# Allegro board AGET_ERNI2HRS_HardBoard.brd
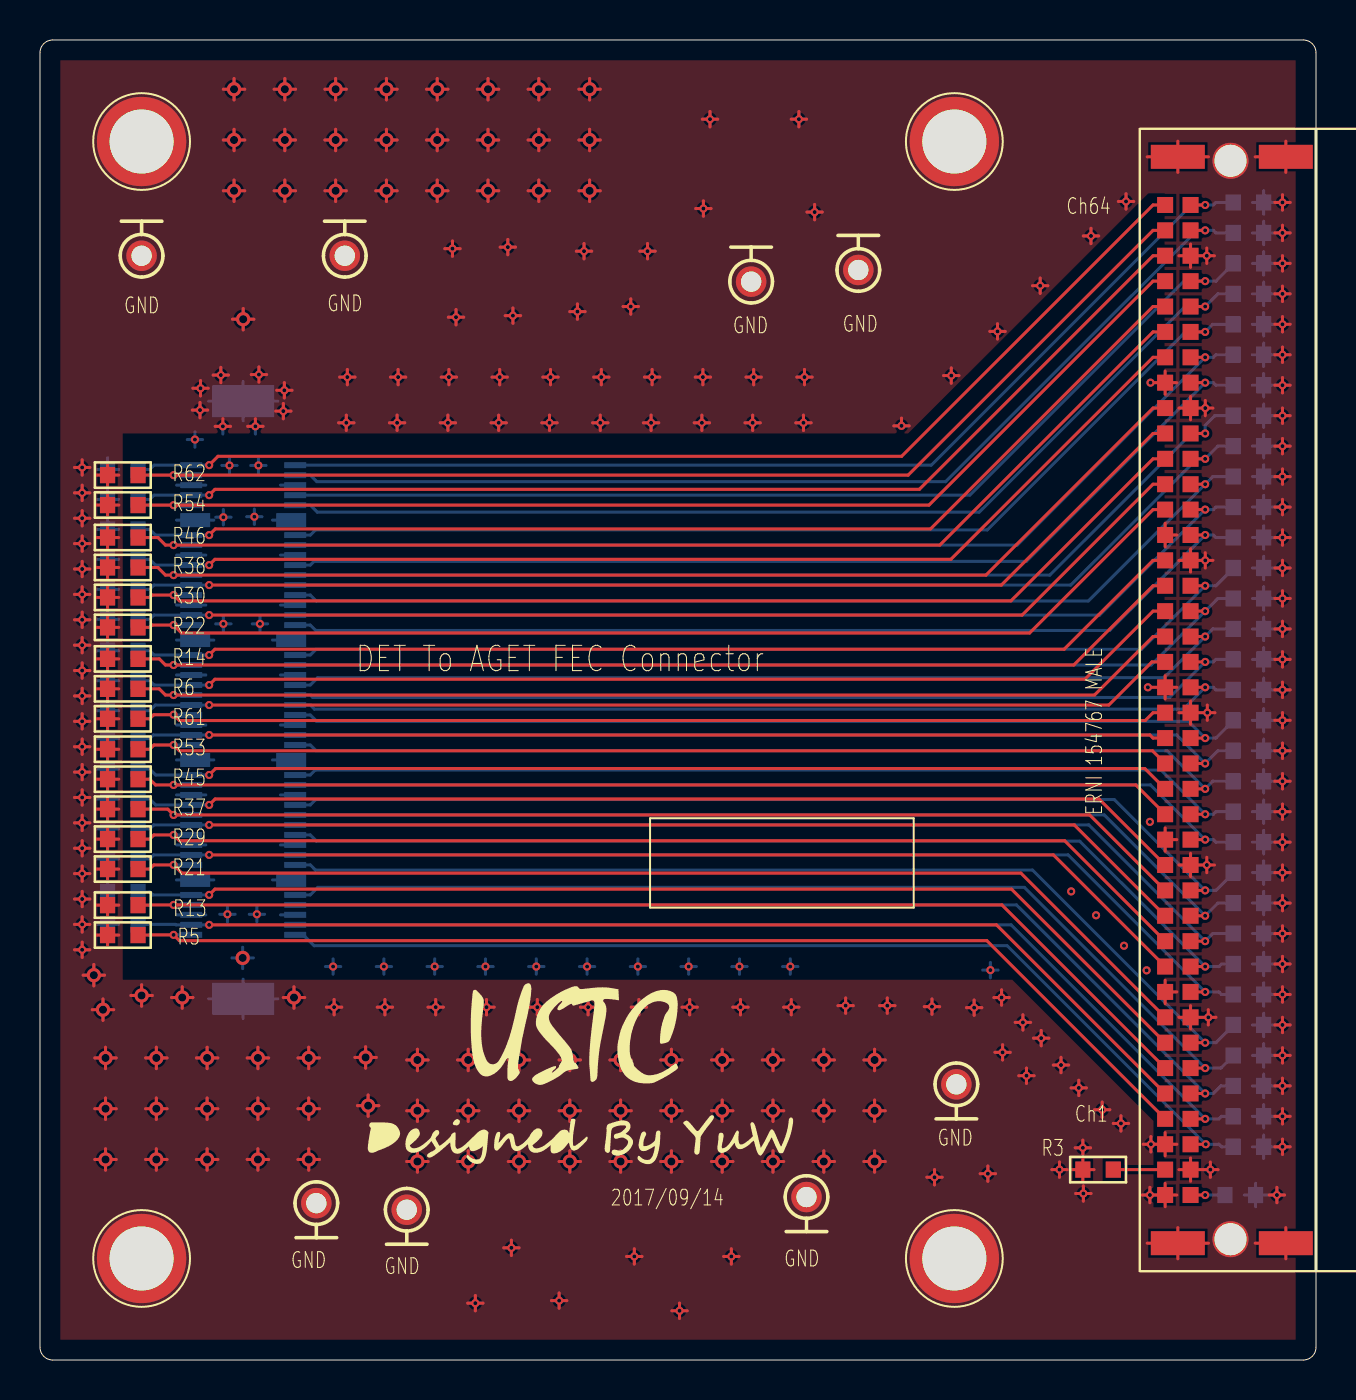
[diagram p0: board, top side]
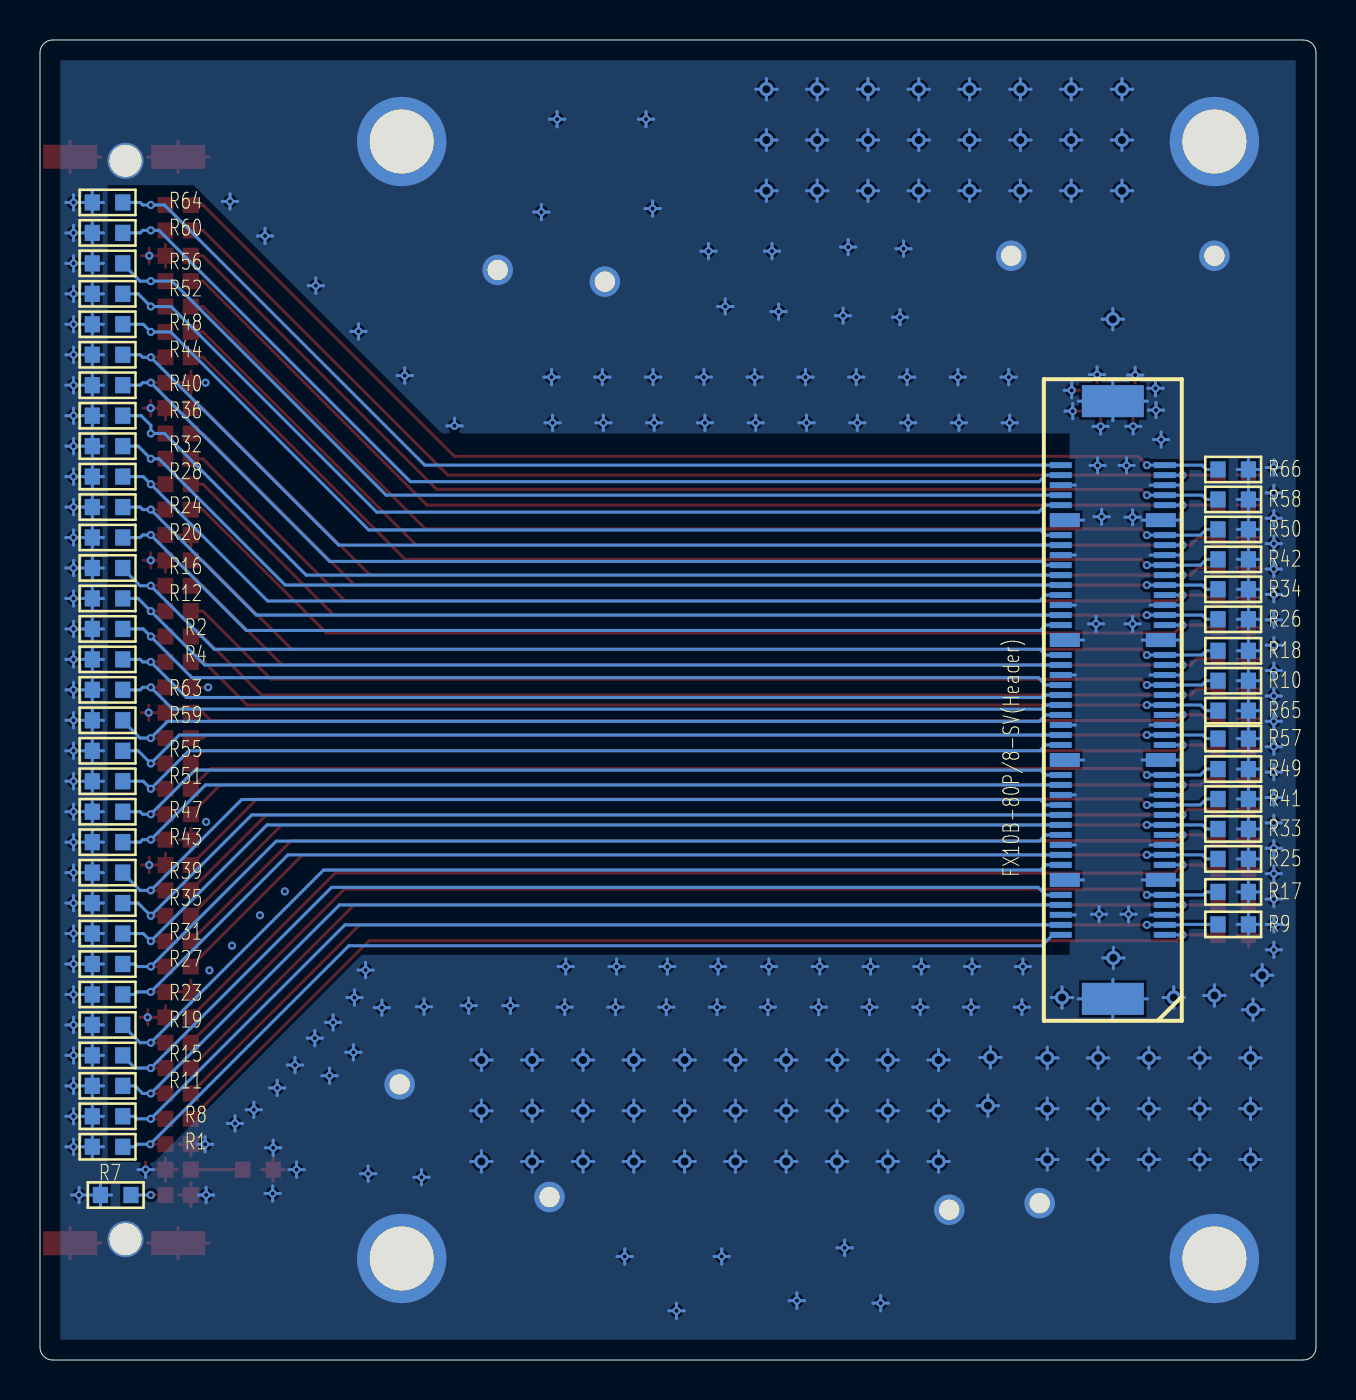
[diagram p1: board, bottom side, seen from below]

Outline 63.8 x 66.04 mm; copper layers: TOP, GND1, GND2, BOTTOM. Coordinates in mm from the lower left corner of the outline.
Outline path: 0,65.41 0,0.64 arc(0.19,0.19) 0.64,0 63.17,0 arc(63.62,0.19) 63.8,0.64 63.8,65.41 arc(63.62,65.85) 63.17,66.04 0.64,66.04 arc(0.19,65.85) 0,65.41

## Placement (name value [footprint] x y rotation side)
J1  CONN  [ERNI154744FEMALECONNECTOR]  57.53 57.78 0 top
M1  MECH_HOLE_3MM  [MECH_HOLE_3_2MM_PLATED]  5.08 60.96 0 top
M2  MECH_HOLE_3MM  [MECH_HOLE_3_2MM_PLATED]  5.08 5.08 0 top
M3  MECH_HOLE_3MM  [MECH_HOLE_3_2MM_PLATED]  45.72 5.08 0 top
M4  MECH_HOLE_3MM  [MECH_HOLE_3_2MM_PLATED]  45.72 60.96 0 top
NOREF  -  []  84.2 64.11 0 top
NOREF#2  -  []  15.11 5.15 0 top
NOREF#3  -  []  0 0 90 top
NOREF#4  -  []  0 66.04 0 top
NOREF#5  -  []  20.17 12.69 0 top
R1  1M  [SR0603]  60.43 10.67 0 bottom
R2  1M  [SR0603]  60.43 36.58 0 bottom
R3  x  [SR0603]  52.91 9.53 180 top
R4  1M  [SR0603]  60.43 35.05 0 bottom
R5  1M  [SR0603]  4.14 21.26 180 top
R6  1M  [SR0603]  4.14 33.58 180 top
R7  x  [SR0603]  60.02 8.26 180 bottom
R8  1M  [SR0603]  60.43 12.19 0 bottom
R9  1M  [SR0603]  4.14 21.79 180 bottom
R10  1M  [SR0603]  4.14 33.99 180 bottom
R11  1M  [SR0603]  60.43 13.72 0 bottom
R12  1M  [SR0603]  60.43 38.1 0 bottom
R13  1M  [SR0603]  4.14 22.76 180 top
R14  1M  [SR0603]  4.14 35.08 180 top
R15  1M  [SR0603]  60.43 15.24 0 bottom
R16  1M  [SR0603]  60.43 39.62 0 bottom
R17  1M  [SR0603]  4.14 23.42 180 bottom
R18  1M  [SR0603]  4.14 35.48 180 bottom
R19  1M  [SR0603]  60.43 16.76 0 bottom
R20  1M  [SR0603]  60.43 41.15 0 bottom
R21  1M  [SR0603]  4.14 24.56 180 top
R22  1M  [SR0603]  4.14 36.65 180 top
R23  1M  [SR0603]  60.43 18.29 0 bottom
R24  1M  [SR0603]  60.43 42.67 0 bottom
R25  1M  [SR0603]  4.14 25.07 180 bottom
R26  1M  [SR0603]  4.14 37.06 180 bottom
R27  1M  [SR0603]  60.43 19.81 0 bottom
R28  1M  [SR0603]  60.43 44.2 0 bottom
R29  1M  [SR0603]  4.14 26.06 180 top
R30  1M  [SR0603]  4.14 38.15 180 top
R31  1M  [SR0603]  60.43 21.34 0 bottom
R32  1M  [SR0603]  60.43 45.72 0 bottom
R33  1M  [SR0603]  4.14 26.57 180 bottom
R34  1M  [SR0603]  4.14 38.56 180 bottom
R35  1M  [SR0603]  60.43 22.86 0 bottom
R36  1M  [SR0603]  60.43 47.24 0 bottom
R37  1M  [SR0603]  4.14 27.56 180 top
R38  1M  [SR0603]  4.14 39.65 180 top
R39  1M  [SR0603]  60.43 24.38 0 bottom
R40  1M  [SR0603]  60.43 48.77 0 bottom
R41  1M  [SR0603]  4.14 28.07 180 bottom
R42  1M  [SR0603]  4.14 40.06 180 bottom
R43  1M  [SR0603]  60.43 25.91 0 bottom
R44  1M  [SR0603]  60.43 50.29 0 bottom
R45  1M  [SR0603]  4.14 29.06 180 top
R46  1M  [SR0603]  4.14 41.15 180 top
R47  1M  [SR0603]  60.43 27.43 0 bottom
R48  1M  [SR0603]  60.43 51.82 0 bottom
R49  1M  [SR0603]  4.14 29.57 180 bottom
R50  1M  [SR0603]  4.14 41.55 180 bottom
R51  1M  [SR0603]  60.43 28.96 0 bottom
R52  1M  [SR0603]  60.43 53.34 0 bottom
R53  1M  [SR0603]  4.14 30.56 180 top
R54  1M  [SR0603]  4.14 42.77 180 top
R55  1M  [SR0603]  60.43 30.48 0 bottom
R56  1M  [SR0603]  60.43 54.86 0 bottom
R57  1M  [SR0603]  4.14 31.09 180 bottom
R58  1M  [SR0603]  4.14 43.05 180 bottom
R59  1M  [SR0603]  60.43 32 0 bottom
R60  1M  [SR0603]  60.43 56.39 0 bottom
R61  1M  [SR0603]  4.14 32.08 180 top
R62  1M  [SR0603]  4.14 44.27 180 top
R63  1M  [SR0603]  60.43 33.53 0 bottom
R64  1M  [SR0603]  60.43 57.91 0 bottom
R65  1M  [SR0603]  4.14 32.49 180 bottom
R66  1M  [SR0603]  4.14 44.55 180 bottom
TP1  GND  [TP_40MIL]  40.92 54.53 0 top
TP2  GND  [TP_40MIL]  18.34 7.52 180 top
TP3  GND  [TP_40MIL]  13.82 7.85 180 top
TP4  GND  [TP_40MIL]  5.08 55.24 0 top
TP5  GND  [TP_40MIL]  15.24 55.24 0 top
TP6  GND  [TP_40MIL]  35.56 53.95 0 top
TP7  GND  [TP_40MIL]  38.33 8.15 180 top
TP8  GND  [TP_40MIL]  45.82 13.79 180 top
U1  FX10B-80S8-SV-Header  [FX10B-80P8-SV-HEADER]  7.01 17.27 90 bottom

## Library data of the parts
J1 = CONN_1
M1-M4 = MECH_HOLE_3MM_Plated
R1 R2 R4-R6 R8-R66 = Resistor
R3 R7 = R
TP1-TP8 = T POINT A
U1 = FX10B-80S8-SV-Header

## Footprints (pads in the part's own frame, mm; a bottom-side part is the same pattern mirrored in y, then rotated)
ERNI154744FEMALECONNECTOR
  rect 2.7x1.199 smd: 1(-0.635,2.41) 2(4.765,2.41) 3(-0.635,-51.94) 4(4.765,-51.94)
  round 1.801 hole 1.6: 5(1.999,2.21) 6(1.999,-51.74)
  rect 0.8x0.8 smd: A1(0,-49.53) A2(0,-48.26) A3(0,-46.99) A4(0,-45.72) A5(0,-44.45) A6(0,-43.18) A7(0,-41.91) A8(0,-40.64) A9(0,-39.37) A10(0,-38.1) A11(0,-36.83) A12(0,-35.56) A13(0,-34.29) A14(0,-33.02) A15(0,-31.75) A16(0,-30.48) A17(0,-29.21) A18(0,-27.94) A19(0,-26.67) A20(0,-25.4) A21(0,-24.13) A22(0,-22.86) A23(0,-21.59) A24(0,-20.32) A25(0,-19.05) A26(0,-17.78) A27(0,-16.51) A28(0,-15.24) A29(0,-13.97) A30(0,-12.7) A31(0,-11.43) A32(0,-10.16) A33(0,-8.89) A34(0,-7.62) A35(0,-6.35) A36(0,-5.08) A37(0,-3.81) A38(0,-2.54) A39(0,-1.27) A40(0,0) B1(-1.27,-49.53) B2(-1.27,-48.26) B3(-1.27,-46.99) B4(-1.27,-45.72) B5(-1.27,-44.45) B6(-1.27,-43.18) B7(-1.27,-41.91) B8(-1.27,-40.64) B9(-1.27,-39.37) B10(-1.27,-38.1) B11(-1.27,-36.83) B12(-1.27,-35.56) B13(-1.27,-34.29) B14(-1.27,-33.02) B15(-1.27,-31.75) B16(-1.27,-30.48) B17(-1.27,-29.21) B18(-1.27,-27.94) B19(-1.27,-26.67) B20(-1.27,-25.4) B21(-1.27,-24.13) B22(-1.27,-22.86) B23(-1.27,-21.59) B24(-1.27,-20.32) B25(-1.27,-19.05) B26(-1.27,-17.78) B27(-1.27,-16.51) B28(-1.27,-15.24) B29(-1.27,-13.97) B30(-1.27,-12.7) B31(-1.27,-11.43) B32(-1.27,-10.16) B33(-1.27,-8.89) B34(-1.27,-7.62) B35(-1.27,-6.35) B36(-1.27,-5.08) B37(-1.27,-3.81) B38(-1.27,-2.54) B39(-1.27,-1.27) B40(-1.27,0)
FX10B-80P8-SV-HEADER
  rect 0.3x1.1 smd: 1(4,5.751) 2(4,0.551) 3(4.501,5.751) 4(4.501,0.551) 5(5.001,5.751) 6(5.001,0.551) 7(5.499,5.751) 8(5.499,0.551) 9(5.999,5.751) 10(5.999,0.551) 13(7.501,5.751) 14(7.501,0.551) 15(8.001,5.751) 16(8.001,0.551) 17(8.499,5.751) 18(8.499,0.551) 19(8.999,5.751) 20(8.999,0.551) 21(9.5,5.751) 22(9.5,0.551) 23(10,5.751) 24(10,0.551) 25(10.5,5.751) 26(10.5,0.551) 27(11.001,5.751) 28(11.001,0.551) 29(11.501,5.751) 30(11.501,0.551) 31(11.999,5.751) 32(11.999,0.551) 35(13.5,5.751) 36(13.5,0.551) 37(14,5.751) 38(14,0.551) 39(14.501,5.751) 40(14.501,0.551) 41(15.001,5.751) 42(15.001,0.551) 43(15.499,5.751) 44(15.499,0.551) 45(15.999,5.751) 46(15.999,0.551) 47(16.5,5.751) 48(16.5,0.551) 49(17,5.751) 50(17,0.551) 51(17.501,5.751) 52(17.501,0.551) 53(18.001,5.751) 54(18.001,0.551) 57(19.5,5.751) 58(19.5,0.551) 59(20,5.751) 60(20,0.551) 61(20.5,5.751) 62(20.5,0.551) 63(21.001,5.751) 64(21.001,0.551) 65(21.501,5.751) 66(21.501,0.551) 67(21.999,5.751) 68(21.999,0.551) 69(22.499,5.751) 70(22.499,0.551) 71(23,5.751) 72(23,0.551) 73(23.5,5.751) 74(23.5,0.551) 75(24,5.751) 76(24,0.551) 79(25.499,5.751) 80(25.499,0.551) 81(25.999,5.751) 82(25.999,0.551) 83(26.5,5.751) 84(26.5,0.551) 85(27,5.751) 86(27,0.551) 87(27.501,5.751) 88(27.501,0.551)
  rect 0.701x1.501 smd: 11(6.749,5.55) 12(6.749,0.749) 33(12.751,5.55) 34(12.751,0.749) 55(18.75,5.55) 56(18.75,0.749) 77(24.75,5.55) 78(24.75,0.749)
  rect 1.6x3.099 smd: B1(0.8,3.15) B2(30.701,3.15)
MECH_HOLE_3_2MM_PLATED
  round 4.47 hole 3.2: 1(0,0)
SR0603
  rect 0.762x0.813 smd: 1(-0.762,0) 2(0.762,0)
TP_40MIL
  round 1.524 hole 1.016: 1(0,0)

## Nets
GND: J1.1(GND#1) J1.2(GND#2) J1.3(GND#3) J1.4(GND#4) J1.5(GND#5) J1.6(GND#6) J1.A2 J1.A8 J1.A14 J1.A20 J1.A26 J1.A32 J1.A38 J1.B1 J1.B3 J1.B9 J1.B15 J1.B21 J1.B27 J1.B33 M1.1(HOLE) M2.1(HOLE) M3.1(HOLE) M4.1(HOLE) R1.2 R2.2 R3.2 R4.2 R5.2 R6.2 R7.1 R8.2 R9.2 R10.2 R11.2 R12.2 R13.2 R14.2 R15.2 R16.2 R17.2 R18.2 R19.2 R20.2 R21.2 R22.2 R23.2 R24.2 R25.2 R26.2 R27.2 R28.2 R29.2 R30.2 R31.2 R32.2 R33.2 R34.2 R35.2 R36.2 R37.2 R38.2 R39.2 R40.2 R41.2 R42.2 R43.2 R44.2 R45.2 R46.2 R47.2 R48.2 R49.2 R50.2 R51.2 R52.2 R53.2 R54.2 R55.2 R56.2 R57.2 R58.2 R59.2 R60.2 R61.2 R62.2 R63.2 R64.2 R65.2 R66.2 TP1.1(TP) TP2.1(TP) TP3.1(TP) TP4.1(TP) TP5.1(TP) TP6.1(TP) TP7.1(TP) TP8.1(TP) U1.5 U1.6 U1.11(GND1) U1.12(GND1-1) U1.17 U1.18 U1.27 U1.28 U1.33(GND2) U1.34(GND2-2) U1.39 U1.40 U1.49 U1.50 U1.55(GND3) U1.56(GND3-3) U1.61 U1.62 U1.71 U1.72 U1.77(GND4) U1.78(GND4-4) U1.83 U1.84 U1.B1(PAD1) U1.B2(PAD2)
INA_01: J1.A3 R1.1 U1.1
INA_02: J1.B4 R5.1 U1.2
INA_03: J1.A4 R8.1 U1.3
INA_04: J1.B5 R9.1 U1.4
INA_05: J1.A5 R11.1 U1.7
INA_06: J1.B6 R13.1 U1.8
INA_07: J1.A6 R15.1 U1.9
INA_08: J1.B7 R17.1 U1.10
INA_09: J1.A7 R19.1 U1.13
INA_10: J1.B8 R21.1 U1.14
INA_11: J1.A9 R23.1 U1.15
INA_12: J1.B10 R25.1 U1.16
INA_13: J1.A10 R27.1 U1.19
INA_14: J1.B11 R29.1 U1.20
INA_15: J1.A11 R31.1 U1.21
INA_16: J1.B12 R33.1 U1.22
INA_17: J1.A12 R35.1 U1.23
INA_18: J1.B13 R37.1 U1.24
INA_19: J1.A13 R39.1 U1.25
INA_20: J1.B14 R41.1 U1.26
INA_21: J1.A15 R43.1 U1.29
INA_22: J1.B16 R45.1 U1.30
INA_23: J1.A16 R47.1 U1.31
INA_24: J1.B17 R49.1 U1.32
INA_25: J1.A17 R51.1 U1.35
INA_26: J1.B18 R53.1 U1.36
INA_27: J1.A18 R55.1 U1.37
INA_28: J1.B19 R57.1 U1.38
INA_29: J1.A19 R59.1 U1.41
INA_30: J1.B20 R61.1 U1.42
INA_31: J1.A21 R63.1 U1.43
INA_32: J1.B22 R65.1 U1.44
INA_33: J1.A22 R4.1 U1.45
INA_34: J1.B23 R6.1 U1.46
INA_35: J1.A23 R2.1 U1.47
INA_36: J1.B24 R10.1 U1.48
INA_37: J1.A24 R12.1 U1.51
INA_38: J1.B25 R14.1 U1.52
INA_39: J1.A25 R16.1 U1.53
INA_40: J1.B26 R18.1 U1.54
INA_41: J1.A27 R20.1 U1.57
INA_42: J1.B28 R22.1 U1.58
INA_43: J1.A28 R24.1 U1.59
INA_44: J1.B29 R26.1 U1.60
INA_45: J1.A29 R28.1 U1.63
INA_46: J1.B30 R30.1 U1.64
INA_47: J1.A30 R32.1 U1.65
INA_48: J1.B31 R34.1 U1.66
INA_49: J1.A31 R36.1 U1.67
INA_50: J1.B32 R38.1 U1.68
INA_51: J1.A33 R40.1 U1.69
INA_52: J1.B34 R42.1 U1.70
INA_53: J1.A34 R44.1 U1.73
INA_54: J1.B35 R46.1 U1.74
INA_55: J1.A35 R48.1 U1.75
INA_56: J1.B36 R50.1 U1.76
INA_57: J1.A36 R52.1 U1.79
INA_58: J1.B37 R54.1 U1.80
INA_59: J1.A37 R56.1 U1.81
INA_60: J1.B38 R58.1 U1.82
INA_61: J1.A39 R60.1 U1.85
INA_62: J1.B39 R62.1 U1.86
INA_63: J1.A40 R64.1 U1.87
INA_64: J1.B40 R66.1 U1.88
N01819: J1.A1 R7.2
N01997: J1.B2 R3.1

## Via types
v1: diameter 0.406, hole 0.203, TOP to BOTTOM, 234 vias
v2: diameter 0.711, hole 0.406, TOP to BOTTOM, 78 vias

## Routing (per net, layer and track width the routed paths; a pad name or vN(x,y) marks a point on that pad's centre or on a via; arc(x,y) is an arc through that point)
GND: length 1021.6
  TOP w0.152: 15.75,15.14 v2(16.28,15.14) ; v2(16.28,15.14) 16.82,15.14 ; v2(16.28,15.14) 16.28,14.6 ; v2(16.28,15.14) 16.28,15.67 ; v1(62.13,15.24) 62.51,15.24 ; v1(62.13,15.24) 62.13,14.86 ; v1(62.13,15.24) 61.74,15.24 ; v1(62.13,15.24) 62.13,15.62 ; 48.77,16.89 v1(49.15,16.89) ; v1(49.15,16.89) 49.15,17.27 ; v1(49.15,16.89) 49.53,16.89 ; v1(49.15,16.89) 49.15,16.51 ; 55.5,7.87 v1(55.5,8.26) ; v1(55.5,8.26) 55.12,8.26 ; v1(55.5,8.26) 55.5,8.64 ; v1(55.5,8.26) 56.26,8.26 ; v1(49.33,14.22) 49.71,14.22 ; v1(49.33,14.22) 49.33,13.84 ; v1(49.33,14.22) 49.33,14.61 ; v1(49.33,14.22) 48.94,14.22 ; v2(23.95,15.01) 24.49,15.01 ; v2(23.95,15.01) 23.42,15.01 ; v2(23.95,15.01) 23.95,14.48 ; v2(23.95,15.01) 23.95,15.55 ; v1(2.11,37.03) 2.11,37.42 ; v1(2.11,37.03) 2.49,37.03 ; v1(2.11,37.03) 2.11,36.65 ; v1(2.11,37.03) 1.72,37.03 ; v1(62.13,45.72) 62.51,45.72 ; v1(62.13,45.72) 61.74,45.72 ; v1(62.13,45.72) 62.13,46.1 ; v1(62.13,45.72) 62.13,45.34 ; 26.82,55.47 v1(27.2,55.47) ; v1(27.2,55.47) 27.2,55.09 ; v1(27.2,55.47) 27.59,55.47 ; v1(27.2,55.47) 27.2,55.86 ; v1(20.8,52.17) 21.19,52.17 ; v1(20.8,52.17) 20.8,51.79 ; v1(20.8,52.17) 20.42,52.17 ; v1(20.8,52.17) 20.8,52.56 ; 31.57,14.48 v2(31.57,15.01) ; v2(31.57,15.01) 31.57,15.55 ; v2(31.57,15.01) 31.04,15.01 ; v2(31.57,15.01) 32.11,15.01 ; v2(16.41,12.73) 16.94,12.73 ; v2(16.41,12.73) 16.41,13.26 ; v2(16.41,12.73) 16.41,12.19 ; v2(16.41,12.73) 15.87,12.73 ; 1.72,28.14 v1(2.11,28.14) ; v1(2.11,28.14) 2.49,28.14 ; v1(2.11,28.14) 2.11,27.76 ; v1(2.11,28.14) 2.11,28.53 ; v1(62.13,19.81) 62.51,19.81 ; v1(62.13,19.81) 62.13,20.2 ; v1(62.13,19.81) 62.13,19.43 ; v1(62.13,19.81) 61.74,19.81 ; 5.28,10.03 v2(5.82,10.03) ; v2(5.82,10.03) 5.82,10.57 ; v2(5.82,10.03) 6.35,10.03 ; v2(5.82,10.03) 5.82,9.5 ; v1(62.13,10.67) 62.13,11.05 ; v1(62.13,10.67) 62.51,10.67 ; v1(62.13,10.67) 61.74,10.67 ; v1(62.13,10.67) 62.13,10.28 ; v1(62.13,38.1) 62.51,38.1 ; v1(62.13,38.1) 62.13,38.48 ; v1(62.13,38.1) 62.13,37.72 ; v1(62.13,38.1) 61.74,38.1 ; 54.31,57.58 v1(54.31,57.96) ; v1(54.31,57.96) 54.31,58.35 ; v1(54.31,57.96) 53.92,57.96 ; v1(54.31,57.96) 54.69,57.96 ; 8.36,14.58 v2(8.36,15.11) ; v2(8.36,15.11) 8.89,15.11 ; v2(8.36,15.11) 7.82,15.11 ; v2(8.36,15.11) 8.36,15.65 ; 56.95,9.53 J1.A2 ; J1.A2 57.53,10.11 ; J1.A2 v1(58.52,9.53) ; J1.A2 57.53,8.94 ; v2(13.44,15.11) 13.97,15.11 ; v2(13.44,15.11) 13.44,14.58 ; v2(13.44,15.11) 12.9,15.11 ; v2(13.44,15.11) 13.44,15.65 ; 24.48,17.65 v1(24.87,17.65) ; v1(24.87,17.65) 24.87,18.04 ; v1(24.87,17.65) 24.87,17.27 ; v1(24.87,17.65) 25.25,17.65 ; 62.13,51.43 v1(62.13,51.82) ; v1(62.13,51.82) 62.13,52.2 ; v1(62.13,51.82) 61.74,51.82 ; v1(62.13,51.82) 62.51,51.82 ; R14.2 3.94,35.08 ; R14.2 2.82,35.08 ; R14.2 3.38,35.66 ; R14.2 3.38,34.49 ; 23.26,52.25 v1(23.65,52.25) ; v1(23.65,52.25) 23.65,51.86 ; v1(23.65,52.25) 24.03,52.25 ; v1(23.65,52.25) 23.65,52.63 ; 4.54,18.24 v2(5.08,18.24) ; v2(5.08,18.24) 5.62,18.24 ; v2(5.08,18.24) 5.08,17.7 ; v2(5.08,18.24) 5.08,18.77 ; v2(29.03,15.01) 29.03,15.55 ; v2(29.03,15.01) 29.03,14.48 ; v2(29.03,15.01) 28.5,15.01 ; v2(29.03,15.01) 29.57,15.01 ; 2.11,31.57 v1(2.11,31.95) ; v1(2.11,31.95) 1.72,31.95 ; v1(2.11,31.95) 2.11,32.34 ; v1(2.11,31.95) 2.49,31.95 ; 61.74,35.05 v1(62.13,35.05) ; v1(62.13,35.05) 62.13,34.67 ; v1(62.13,35.05) 62.13,35.44 ; v1(62.13,35.05) 62.51,35.05 ; 33.5,61.69 v1(33.5,62.08) ; v1(33.5,62.08) 33.89,62.08 ; v1(33.5,62.08) 33.12,62.08 ; v1(33.5,62.08) 33.5,62.46 ; J1.A8 v1(58.42,17.14) ; J1.A8 57.53,16.56 ; J1.A8 56.95,17.14 ; J1.A8 57.53,17.73 ; v1(58.42,17.14) 58.8,17.14 ; v1(58.42,17.14) 58.42,17.53 ; v1(58.42,17.14) 58.42,16.76 ; v1(2.11,33.22) 2.11,33.61 ; v1(2.11,33.22) 2.11,32.84 ; v1(2.11,33.22) 1.72,33.22 ; v1(2.11,33.22) 2.49,33.22 ; 2.82,22.76 R13.2 ; R13.2 3.38,23.35 ; R13.2 3.38,22.17 ; R13.2 3.94,22.76 ; v1(2.11,23.06) 2.49,23.06 ; v1(2.11,23.06) 1.72,23.06 ; v1(2.11,23.06) 2.11,22.68 ; v1(2.11,23.06) 2.11,23.45 ; 56.26,26.04 56.84,26.04 ; 56.26,26.04 56.26,26.62 ; 56.26,26.04 56.26,25.45 ; v1(9.14,46.71) 9.14,47.09 ; v1(9.14,46.71) 8.76,46.71 ; v1(9.14,46.71) 9.53,46.71 ; v2(36.65,15.01) 37.19,15.01 ; v2(36.65,15.01) 36.12,15.01 ; v2(36.65,15.01) 36.65,15.55 ; v2(36.65,15.01) 36.65,14.48 ; v1(62.13,47.24) 62.51,47.24 ; v1(62.13,47.24) 62.13,46.86 ; v1(62.13,47.24) 61.74,47.24 ; v1(62.13,47.24) 62.13,47.63 ; v1(23.39,55.68) 23.78,55.68 ; v1(23.39,55.68) 23.39,56.06 ; v1(23.39,55.68) 23.01,55.68 ; v1(23.39,55.68) 23.39,55.29 ; 61.74,53.34 v1(62.13,53.34) ; v1(62.13,53.34) 62.13,52.96 ; v1(62.13,53.34) 62.51,53.34 ; v1(62.13,53.34) 62.13,53.72 ; v1(62.13,42.67) 62.51,42.67 ; v1(62.13,42.67) 62.13,42.29 ; v1(62.13,42.67) 61.74,42.67 ; v1(62.13,42.67) 62.13,43.06 ; 62.13,17.9 v1(62.13,18.29) ; v1(62.13,18.29) 62.13,18.67 ; v1(62.13,18.29) 62.51,18.29 ; v1(62.13,18.29) 61.74,18.29 ; v1(51.94,13.61) 52.33,13.61 ; v1(51.94,13.61) 51.94,13.23 ; v1(51.94,13.61) 51.56,13.61 ; v1(51.94,13.61) 51.94,14 ; 29.33,5.18 v1(29.72,5.18) ; v1(29.72,5.18) 29.72,4.8 ; v1(29.72,5.18) 30.1,5.18 ; v1(29.72,5.18) 29.72,5.57 ; 61.74,16.76 v1(62.13,16.76) ; v1(62.13,16.76) 62.13,17.15 ; v1(62.13,16.76) 62.13,16.38 ; v1(62.13,16.76) 62.51,16.76 ; R3.2 52.71,9.53 ; R3.2 51.58,9.53 ; R3.2 52.15,8.94 ; R3.2 52.15,10.11 ; 39.19,14.48 v2(39.19,15.01) ; v2(39.19,15.01) 39.19,15.55 ; v2(39.19,15.01) 39.73,15.01 ; v2(39.19,15.01) 38.66,15.01 ; 36.65,9.4 v2(36.65,9.93) ; v2(36.65,9.93) 36.65,10.47 ; v2(36.65,9.93) 37.19,9.93 ; v2(36.65,9.93) 36.12,9.93 ; 45.18,49.25 v1(45.57,49.25) ; v1(45.57,49.25) 45.95,49.25 ; v1(45.57,49.25) 45.57,48.87 ; v1(45.57,49.25) 45.57,49.63 ; v1(62.13,39.62) 62.51,39.62 ; v1(62.13,39.62) 62.13,39.24 ; v1(62.13,39.62) 62.13,40.01 ; v1(62.13,39.62) 61.74,39.62 ; v1(2.11,25.6) 2.11,25.99 ; v1(2.11,25.6) 1.72,25.6 ; v1(2.11,25.6) 2.49,25.6 ; v1(2.11,25.6) 2.11,25.22 ; v2(3.15,17.53) 3.15,18.06 ; v2(3.15,17.53) 3.69,17.53 ; v2(3.15,17.53) 2.61,17.53 ; v2(3.15,17.53) 3.15,16.99 ; 34.57,4.8 v1(34.57,5.18) ; v1(34.57,5.18) 34.19,5.18 ; v1(34.57,5.18) 34.95,5.18 ; v1(34.57,5.18) 34.57,5.57 ; 2.11,34.11 v1(2.11,34.49) ; v1(2.11,34.49) 2.11,34.88 ; v1(2.11,34.49) 1.72,34.49 ; v1(2.11,34.49) 2.49,34.49 ; 3.38,28.47 R45.2 ; R45.2 2.82,29.06 ; R45.2 3.38,29.64 ; R45.2 3.94,29.06 ; 18.34,9.93 v2(18.87,9.93) ; v2(18.87,9.93) 19.41,9.93 ; v2(18.87,9.93) 18.87,10.47 ; v2(18.87,9.93) 18.87,9.4 ; 1.72,29.41 v1(2.11,29.41) ; v1(2.11,29.41) 2.11,29.8 ; v1(2.11,29.41) 2.49,29.41 ; v1(2.11,29.41) 2.11,29.03 ; 22.99,48.79 v1(22.99,49.17) ; v1(22.99,49.17) 22.6,49.17 ; v1(22.99,49.17) 22.99,49.56 ; v1(22.99,49.17) 23.37,49.17 ; 58.27,39.62 v1(58.27,40.01) ; v1(58.27,40.01) 58.27,40.39 ; v1(58.27,40.01) J1.A26 ; v1(58.27,40.01) 58.65,40.01 ; J1.B9 56.26,19 ; J1.B9 56.26,17.83 ; J1.B9 56.84,18.41 ; 39.19,11.94 v2(39.19,12.47) ; v2(39.19,12.47) 38.66,12.47 ; v2(39.19,12.47) 39.73,12.47 ; v2(39.19,12.47) 39.19,13.01 ; 5.28,15.11 v2(5.82,15.11) ; v2(5.82,15.11) 5.82,14.58 ; v2(5.82,15.11) 5.82,15.65 ; v2(5.82,15.11) 6.35,15.11 ; v1(46.71,17.63) 46.71,18.01 ; v1(46.71,17.63) 46.71,17.24 ; v1(46.71,17.63) 46.33,17.63 ; v1(46.71,17.63) 47.09,17.63 ; v2(14.78,58.5) 14.78,59.03 ; v2(14.78,58.5) 15.32,58.5 ; v2(14.78,58.5) 14.78,57.96 ; v2(14.78,58.5) 14.25,58.5 ; v1(62.13,57.91) 62.51,57.91 ; v1(62.13,57.91) 62.13,58.3 ; v1(62.13,57.91) 62.13,57.53 ; v1(62.13,57.91) 61.74,57.91 ; 48.08,17.75 v1(48.08,18.14) ; v1(48.08,18.14) 48.47,18.14 ; v1(48.08,18.14) 48.08,18.52 ; v1(48.08,18.14) 47.7,18.14 ; 19.86,63.04 v2(19.86,63.58) ; v2(19.86,63.58) 20.4,63.58 ; v2(19.86,63.58) 19.33,63.58 ; v2(19.86,63.58) 19.86,64.11 ; 26.49,14.48 v2(26.49,15.01) ; v2(26.49,15.01) 27.03,15.01 ; v2(26.49,15.01) 26.49,15.55 ; v2(26.49,15.01) 25.96,15.01 ; J1.A38 v1(58.34,55.24) ; J1.A38 57.53,54.66 ; J1.A38 57.53,55.83 ; J1.A38 56.95,55.24 ; v1(58.34,55.24) 58.34,55.63 ; v1(58.34,55.24) 58.34,54.86 ; v1(58.34,55.24) 58.73,55.24 ; 61.74,50.29 v1(62.13,50.29) ; v1(62.13,50.29) 62.13,49.91 ; v1(62.13,50.29) 62.51,50.29 ; v1(62.13,50.29) 62.13,50.68 ; R62.2 3.94,44.27 ; R62.2 3.38,44.86 ; R62.2 3.38,43.69 ; R62.2 2.82,44.27 ; v1(20.45,49.17) 20.83,49.17 ; v1(20.45,49.17) 20.45,49.56 ; v1(20.45,49.17) 20.06,49.17 ; v1(20.45,49.17) 20.45,48.79 ; v1(28.02,46.89) 28.4,46.89 ; v1(28.02,46.89) 28.02,47.27 ; v1(28.02,46.89) 27.63,46.89 ; v1(28.02,46.89) 28.02,46.5 ; J1.A20 v1(58.37,32.38) ; J1.A20 57.53,32.97 ; J1.A20 56.95,32.38 ; J1.A20 57.53,31.8 ; v1(58.37,32.38) 58.37,32.77 ; v1(58.37,32.38) 58.37,32 ; v1(58.37,32.38) 58.75,32.38 ; 62.13,56 v1(62.13,56.39) ; v1(62.13,56.39) 61.74,56.39 ; v1(62.13,56.39) 62.51,56.39 ; v1(62.13,56.39) 62.13,56.77 ; 2.11,37.92 v1(2.11,38.3) ; v1(2.11,38.3) 2.11,38.69 ; v1(2.11,38.3) 2.49,38.3 ; v1(2.11,38.3) 1.72,38.3 ; 19.33,58.5 v2(19.86,58.5) ; v2(19.86,58.5) 19.86,59.03 ; v2(19.86,58.5) 19.86,57.96 ; v2(19.86,58.5) 20.4,58.5 ; 10.36,15.11 v2(10.9,15.11) ; v2(10.9,15.11) 11.43,15.11 ; v2(10.9,15.11) 10.9,14.58 ; v2(10.9,15.11) 10.9,15.65 ; 25.48,46.5 v1(25.48,46.89) ; v1(25.48,46.89) 25.48,47.27 ; v1(25.48,46.89) 25.86,46.89 ; v1(25.48,46.89) 25.09,46.89 ; 61.74,44.2 v1(62.13,44.2) ; v1(62.13,44.2) 62.13,44.58 ; v1(62.13,44.2) 62.13,43.81 ; v1(62.13,44.2) 62.51,44.2 ; v1(2.11,40.84) 2.11,41.23 ; v1(2.11,40.84) 2.49,40.84 ; v1(2.11,40.84) 2.11,40.46 ; v1(2.11,40.84) 1.72,40.84 ; v2(18.87,12.47) 18.87,13.01 ; v2(18.87,12.47) 19.41,12.47 ; v2(18.87,12.47) 18.87,11.94 ; v2(18.87,12.47) 18.34,12.47 ; 2.11,35.38 v1(2.11,35.76) ; v1(2.11,35.76) 1.72,35.76 ; v1(2.11,35.76) 2.49,35.76 ; v1(2.11,35.76) 2.11,36.15 ; 56.26,40.69 56.26,41.27 ; 56.26,41.27 56.84,41.27 ; 56.26,41.27 56.26,41.86 ; v1(27.41,17.65) 27.79,17.65 ; v1(27.41,17.65) 27.02,17.65 ; v1(27.41,17.65) 27.41,18.04 ; v1(27.41,17.65) 27.41,17.27 ; v1(53.11,12.52) 53.11,12.91 ; v1(53.11,12.52) 53.49,12.52 ; v1(53.11,12.52) 52.73,12.52 ; v1(53.11,12.52) 53.11,12.14 ; 12.9,10.03 v2(13.44,10.03) ; v2(13.44,10.03) 13.44,9.5 ; v2(13.44,10.03) 13.44,10.57 ; v2(13.44,10.03) 13.97,10.03 ; 62.13,48.38 v1(62.13,48.77) ; v1(62.13,48.77) 61.74,48.77 ; v1(62.13,48.77) 62.13,49.15 ; v1(62.13,48.77) 62.51,48.77 ; v1(2.11,20.52) 2.11,20.91 ; v1(2.11,20.52) 2.49,20.52 ; v1(2.11,20.52) 2.11,20.14 ; v1(2.11,20.52) 1.72,20.52 ; v2(22.4,63.58) 22.94,63.58 ; v2(22.4,63.58) 21.87,63.58 ; v2(22.4,63.58) 22.4,64.11 ; v2(22.4,63.58) 22.4,63.04 ; 7.82,10.03 v2(8.36,10.03) ; v2(8.36,10.03) 8.89,10.03 ; v2(8.36,10.03) 8.36,9.5 ; v2(8.36,10.03) 8.36,10.57 ; 2.74,12.57 v2(3.28,12.57) ; v2(3.28,12.57) 3.28,13.11 ; v2(3.28,12.57) 3.81,12.57 ; v2(3.28,12.57) 3.28,12.04 ; 26.49,52.45 v1(26.87,52.45) ; v1(26.87,52.45) 27.26,52.45 ; v1(26.87,52.45) 26.87,52.07 ; v1(26.87,52.45) 26.87,52.83 ; v2(13.44,12.57) 13.97,12.57 ; v2(13.44,12.57) 13.44,13.11 ; v2(13.44,12.57) 12.9,12.57 ; v2(13.44,12.57) 13.44,12.04 ; v1(20.62,55.6) 20.62,55.98 ; v1(20.62,55.6) 20.62,55.22 ; v1(20.62,55.6) 20.24,55.6 ; v1(20.62,55.6) 21.01,55.6 ; v1(62.13,25.91) 62.13,26.29 ; v1(62.13,25.91) 62.51,25.91 ; v1(62.13,25.91) 61.74,25.91 ; v1(62.13,25.91) 62.13,25.52 ; 2.11,26.49 v1(2.11,26.87) ; v1(2.11,26.87) 1.72,26.87 ; v1(2.11,26.87) 2.49,26.87 ; v1(2.11,26.87) 2.11,27.26 ; 56.95,40.01 J1.A26 ; J1.A26 57.53,40.59 ; J1.A26 57.53,39.42 ; 2.11,44.27 v1(2.11,44.65) ; v1(2.11,44.65) 2.49,44.65 ; v1(2.11,44.65) 1.72,44.65 ; v1(2.11,44.65) 2.11,45.04 ; 51.76,10.62 v1(52.15,10.62) ; v1(52.15,10.62) 52.53,10.62 ; v1(52.15,10.62) 52.15,10.23 ; v1(52.15,10.62) 52.15,11 ; v1(35.64,46.89) 36.02,46.89 ; v1(35.64,46.89) 35.25,46.89 ; v1(35.64,46.89) 35.64,46.5 ; v1(35.64,46.89) 35.64,47.27 ; v1(44.6,17.68) 44.99,17.68 ; v1(44.6,17.68) 44.6,17.29 ; v1(44.6,17.68) 44.6,18.06 ; v1(44.6,17.68) 44.22,17.68 ; R46.2 3.94,41.15 ; R46.2 3.38,41.73 ; R46.2 2.82,41.15 ; R46.2 3.38,40.56 ; v1(25.96,2.97) 26.34,2.97 ; v1(25.96,2.97) 25.96,3.36 ; v1(25.96,2.97) 25.96,2.59 ; v1(25.96,2.97) 25.58,2.97 ; v1(33.15,49.17) 33.15,49.56 ; v1(33.15,49.17) 32.76,49.17 ; v1(33.15,49.17) 33.53,49.17 ; v1(33.15,49.17) 33.15,48.79 ; 55.36,5.84 J1.3 ; J1.3 58.43,5.84 ; J1.3 56.9,6.62 ; J1.3 56.9,5.06 ; 36.65,11.94 v2(36.65,12.47) ; v2(36.65,12.47) 36.65,13.01 ; v2(36.65,12.47) 36.12,12.47 ; v2(36.65,12.47) 37.19,12.47 ; 44.35,9.14 v1(44.73,9.14) ; v1(44.73,9.14) 44.73,9.53 ; v1(44.73,9.14) 44.73,8.76 ; v1(44.73,9.14) 45.11,9.14 ; v2(41.73,9.93) 41.73,10.47 ; v2(41.73,9.93) 42.27,9.93 ; v2(41.73,9.93) 41.2,9.93 ; v2(41.73,9.93) 41.73,9.4 ; v1(62.13,41.15) 62.51,41.15 ; v1(62.13,41.15) 61.74,41.15 ; v1(62.13,41.15) 62.13,41.53 ; v1(62.13,41.15) 62.13,40.76 ; 8.36,12.04 v2(8.36,12.57) ; v2(8.36,12.57) 8.36,13.11 ; v2(8.36,12.57) 8.89,12.57 ; v2(8.36,12.57) 7.82,12.57 ; v1(62.13,13.72) 62.51,13.72 ; v1(62.13,13.72) 61.74,13.72 ; v1(62.13,13.72) 62.13,14.1 ; v1(62.13,13.72) 62.13,13.33 ; v2(27.48,61.04) 28.02,61.04 ; v2(27.48,61.04) 27.48,60.5 ; v2(27.48,61.04) 27.48,61.57 ; v2(27.48,61.04) 26.95,61.04 ; R38.2 3.94,39.65 ; R38.2 2.82,39.65 ; R38.2 3.38,39.06 ; R38.2 3.38,40.24 ; 9.7,60.5 v2(9.7,61.04) ; v2(9.7,61.04) 10.24,61.04 ; v2(9.7,61.04) 9.17,61.04 ; v2(9.7,61.04) 9.7,61.57 ; 12.24,63.04 v2(12.24,63.58) ; v2(12.24,63.58) 12.78,63.58 ; v2(12.24,63.58) 11.71,63.58 ; v2(12.24,63.58) 12.24,64.11 ; v1(2.11,30.68) 2.11,31.07 ; v1(2.11,30.68) 2.49,30.68 ; v1(2.11,30.68) 2.11,30.3 ; v1(2.11,30.68) 1.72,30.68 ; v1(15.32,46.89) 15.32,47.27 ; v1(15.32,46.89) 15.7,46.89 ; v1(15.32,46.89) 14.93,46.89 ; v1(15.32,46.89) 15.32,46.5 ; 33.17,57.22 v1(33.17,57.61) ; v1(33.17,57.61) 33.56,57.61 ; v1(33.17,57.61) 33.17,57.99 ; v1(33.17,57.61) 32.79,57.61 ; 2.82,21.26 R5.2 ; R5.2 3.94,21.26 ; R5.2 3.38,21.85 ; R5.2 3.38,20.67 ; 21.87,58.5 v2(22.4,58.5) ; v2(22.4,58.5) 22.4,57.96 ; v2(22.4,58.5) 22.94,58.5 ; v2(22.4,58.5) 22.4,59.03 ; 1.72,21.79 v1(2.11,21.79) ; v1(2.11,21.79) 2.11,21.41 ; v1(2.11,21.79) 2.11,22.18 ; v1(2.11,21.79) 2.49,21.79 ; 61.74,54.86 v1(62.13,54.86) ; v1(62.13,54.86) 62.13,55.25 ; v1(62.13,54.86) 62.13,54.48 ; v1(62.13,54.86) 62.51,54.86 ; v1(54.05,11.84) 54.05,12.22 ; v1(54.05,11.84) 54.05,11.45 ; v1(54.05,11.84) 54.43,11.84 ; v1(54.05,11.84) 53.67,11.84 ; 60.76,60.2 J1.2 ; J1.2 62.3,59.42 ; J1.2 62.3,60.98 ; v1(62.13,32) 62.13,32.39 ; v1(62.13,32) 62.13,31.62 ; v1(62.13,32) 62.51,32 ; v1(62.13,32) 61.74,32 ; v1(40.28,17.73) 40.67,17.73 ; v1(40.28,17.73) 40.28,18.11 ; v1(40.28,17.73) 40.28,17.35 ; v1(40.28,17.73) 39.9,17.73 ; R37.2 3.94,27.56 ; R37.2 2.82,27.56 ; R37.2 3.38,28.15 ; R37.2 3.38,26.97 ; 19.86,60.5 v2(19.86,61.04) ; v2(19.86,61.04) 20.4,61.04 ; v2(19.86,61.04) 19.86,61.57 ; v2(19.86,61.04) 19.33,61.04 ; v1(38.18,46.89) 38.18,47.27 ; v1(38.18,46.89) 38.18,46.5 ; v1(38.18,46.89) 38.56,46.89 ; v1(38.18,46.89) 37.79,46.89 ; 29.03,11.94 v2(29.03,12.47) ; v2(29.03,12.47) 28.5,12.47 ; v2(29.03,12.47) 29.03,13.01 ; v2(29.03,12.47) 29.57,12.47 ; v1(17.86,46.89) 18.24,46.89 ; v1(17.86,46.89) 17.47,46.89 ; v1(17.86,46.89) 17.86,47.27 ; v1(17.86,46.89) 17.86,46.5 ; v1(37.95,62.08) 37.95,62.46 ; v1(37.95,62.08) 37.95,61.69 ; v1(37.95,62.08) 38.33,62.08 ; v1(37.95,62.08) 37.56,62.08 ; 10.56,49.3 v1(10.95,49.3) ; v1(10.95,49.3) 10.95,49.68 ; v1(10.95,49.3) 11.33,49.3 ; v1(10.95,49.3) 10.95,48.92 ; 41.2,15.01 v2(41.73,15.01) ; v2(41.73,15.01) 41.73,14.48 ; v2(41.73,15.01) 42.27,15.01 ; v2(41.73,15.01) 41.73,15.55 ; v2(31.57,9.93) 32.11,9.93 ; v2(31.57,9.93) 31.04,9.93 ; v2(31.57,9.93) 31.57,10.47 ; v2(31.57,9.93) 31.57,9.4 ; v1(38.73,57.43) 38.73,57.81 ; v1(38.73,57.43) 38.35,57.43 ; v1(38.73,57.43) 39.12,57.43 ; v1(38.73,57.43) 38.73,57.05 ; v1(62.13,33.53) 62.51,33.53 ; v1(62.13,33.53) 61.74,33.53 ; v1(62.13,33.53) 62.13,33.14 ; v1(62.13,33.53) 62.13,33.91 ; v2(29.03,9.93) 29.03,10.47 ; v2(29.03,9.93) 28.5,9.93 ; v2(29.03,9.93) 29.03,9.4 ; v2(29.03,9.93) 29.57,9.93 ; 1.72,43.38 v1(2.11,43.38) ; v1(2.11,43.38) 2.49,43.38 ; v1(2.11,43.38) 2.11,43.77 ; v1(2.11,43.38) 2.11,43 ; 11.83,48.51 v1(12.22,48.51) ; v1(12.22,48.51) 12.22,48.13 ; v1(12.22,48.51) 12.22,48.9 ; v1(12.22,48.51) 12.6,48.51 ; v1(23.57,5.61) 23.95,5.61 ; v1(23.57,5.61) 23.19,5.61 ; v1(23.57,5.61) 23.57,5.23 ; v1(23.57,5.61) 23.57,6 ; v2(24.94,58.5) 25.48,58.5 ; v2(24.94,58.5) 24.41,58.5 ; v2(24.94,58.5) 24.94,57.96 ; v2(24.94,58.5) 24.94,59.03 ; v2(23.95,9.93) 24.49,9.93 ; v2(23.95,9.93) 23.95,10.47 ; v2(23.95,9.93) 23.42,9.93 ; v2(23.95,9.93) 23.95,9.4 ; 26.49,11.94 v2(26.49,12.47) ; v2(26.49,12.47) 26.49,13.01 ; v2(26.49,12.47) 27.03,12.47 ; v2(26.49,12.47) 25.96,12.47 ; 7.11,17.6 v2(7.11,18.14) ; v2(7.11,18.14) 7.11,18.67 ; v2(7.11,18.14) 6.58,18.14 ; v2(7.11,18.14) 7.65,18.14 ; v2(3.28,15.11) 3.28,15.65 ; v2(3.28,15.11) 3.81,15.11 ; v2(3.28,15.11) 3.28,14.58 ; v2(3.28,15.11) 2.74,15.11 ; v2(34.11,9.93) 34.11,10.47 ; v2(34.11,9.93) 33.58,9.93 ; v2(34.11,9.93) 34.65,9.93 ; v2(34.11,9.93) 34.11,9.4 ; 10.16,51.53 v2(10.16,52.07) ; v2(10.16,52.07) 10.16,52.61 ; v2(10.16,52.07) 10.7,52.07 ; v2(10.16,52.07) 9.62,52.07 ; 18.34,15.01 v2(18.87,15.01) ; v2(18.87,15.01) 18.87,14.48 ; v2(18.87,15.01) 19.41,15.01 ; v2(18.87,15.01) 18.87,15.55 ; 23.95,11.94 v2(23.95,12.47) ; v2(23.95,12.47) 23.42,12.47 ; v2(23.95,12.47) 24.49,12.47 ; v2(23.95,12.47) 23.95,13.01 ; R22.2 3.94,36.65 ; R22.2 2.82,36.65 ; R22.2 3.38,36.07 ; R22.2 3.38,37.24 ; v2(27.48,63.58) 27.48,64.11 ; v2(27.48,63.58) 28.02,63.58 ; v2(27.48,63.58) 26.95,63.58 ; v2(27.48,63.58) 27.48,63.04 ; v1(38.23,49.17) 38.61,49.17 ; v1(38.23,49.17) 38.23,49.56 ; v1(38.23,49.17) 38.23,48.79 ; v1(38.23,49.17) 37.84,49.17 ; v2(14.78,61.04) 15.32,61.04 ; v2(14.78,61.04) 14.78,61.57 ; v2(14.78,61.04) 14.78,60.5 ; v2(14.78,61.04) 14.25,61.04 ; 17.52,49.17 v1(17.91,49.17) ; v1(17.91,49.17) 17.91,48.79 ; v1(17.91,49.17) 17.91,49.56 ; v1(17.91,49.17) 18.29,49.17 ; v1(14.71,17.65) 15.09,17.65 ; v1(14.71,17.65) 14.32,17.65 ; v1(14.71,17.65) 14.71,18.04 ; v1(14.71,17.65) 14.71,17.27 ; v2(12.7,18.14) 12.7,18.67 ; v2(12.7,18.14) 12.16,18.14 ; v2(12.7,18.14) 12.7,17.6 ; v2(12.7,18.14) 13.24,18.14 ; R54.2 3.94,42.77 ; R54.2 3.38,43.36 ; R54.2 2.82,42.77 ; R54.2 3.38,42.19 ; v1(52.55,56.24) 52.94,56.24 ; v1(52.55,56.24) 52.55,55.85 ; v1(52.55,56.24) 52.17,56.24 ; v1(52.55,56.24) 52.55,56.62 ; v2(9.7,58.5) 9.7,59.03 ; v2(9.7,58.5) 10.24,58.5 ; v2(9.7,58.5) 9.17,58.5 ; v2(9.7,58.5) 9.7,57.96 ; 22.33,17.27 v1(22.33,17.65) ; v1(22.33,17.65) 21.94,17.65 ; v1(22.33,17.65) 22.33,18.04 ; v1(22.33,17.65) 22.71,17.65 ; J1.A32 v1(58.27,47.62) ; J1.A32 56.95,47.62 ; J1.A32 57.53,48.21 ; J1.A32 57.53,47.04 ; v1(58.27,47.62) 58.27,48.01 ; v1(58.27,47.62) 58.65,47.62 ; v1(58.27,47.62) 58.27,47.24 ; 29.54,52.32 v1(29.54,52.7) ; v1(29.54,52.7) 29.92,52.7 ; v1(29.54,52.7) 29.54,53.09 ; v1(29.54,52.7) 29.16,52.7 ; v2(14.78,63.58) 15.32,63.58 ; v2(14.78,63.58) 14.25,63.58 ; v2(14.78,63.58) 14.78,64.11 ; v2(14.78,63.58) 14.78,63.04 ; v2(26.49,9.93) 26.49,10.47 ; v2(26.49,9.93) 26.49,9.4 ; v2(26.49,9.93) 25.96,9.93 ; v2(26.49,9.93) 27.03,9.93 ; v2(39.19,9.93) 39.19,10.47 ; v2(39.19,9.93) 39.73,9.93 ; v2(39.19,9.93) 38.66,9.93 ; v2(39.19,9.93) 39.19,9.4 ; 22.94,46.5 v1(22.94,46.89) ; v1(22.94,46.89) 23.32,46.89 ; v1(22.94,46.89) 22.94,47.27 ; v1(22.94,46.89) 22.55,46.89 ; 20.88,15.01 v2(21.41,15.01) ; v2(21.41,15.01) 21.41,15.55 ; v2(21.41,15.01) 21.41,14.48 ; v2(21.41,15.01) 21.95,15.01 ; 28.07,48.79 v1(28.07,49.17) ; v1(28.07,49.17) 28.07,49.56 ; v1(28.07,49.17) 28.45,49.17 ; v1(28.07,49.17) 27.68,49.17 ; R29.2 3.38,26.65 ; R29.2 3.38,25.47 ; R29.2 2.82,26.06 ; R29.2 3.94,26.06 ; v1(35.69,49.17) 35.69,49.56 ; v1(35.69,49.17) 35.69,48.79 ; v1(35.69,49.17) 36.07,49.17 ; v1(35.69,49.17) 35.3,49.17 ; v1(30.56,46.89) 30.56,47.27 ; v1(30.56,46.89) 30.17,46.89 ; v1(30.56,46.89) 30.56,46.5 ; v1(30.56,46.89) 30.94,46.89 ; 2.82,38.15 R30.2 ; R30.2 3.94,38.15 ; R30.2 3.38,38.74 ; R30.2 3.38,37.56 ; 50.06,15.72 v1(50.06,16.1) ; v1(50.06,16.1) 50.45,16.1 ; v1(50.06,16.1) 49.68,16.1 ; v1(50.06,16.1) 50.06,16.49 ; 58.34,24.38 v1(58.34,24.77) ; v1(58.34,24.77) 58.73,24.77 ; v1(58.34,24.77) 58.34,25.15 ; v1(58.34,24.77) J1.A14 ; 33.58,15.01 v2(34.11,15.01) ; v2(34.11,15.01) 34.11,14.48 ; v2(34.11,15.01) 34.65,15.01 ; v2(34.11,15.01) 34.11,15.55 ; v1(42.37,17.73) 42.75,17.73 ; v1(42.37,17.73) 42.37,18.11 ; v1(42.37,17.73) 41.98,17.73 ; v1(42.37,17.73) 42.37,17.35 ; 41.73,11.94 v2(41.73,12.47) ; v2(41.73,12.47) 41.2,12.47 ; v2(41.73,12.47) 42.27,12.47 ; v2(41.73,12.47) 41.73,13.01 ; 27.48,57.96 v2(27.48,58.5) ; v2(27.48,58.5) 27.48,59.03 ; v2(27.48,58.5) 28.02,58.5 ; v2(27.48,58.5) 26.95,58.5 ; 1.72,39.57 v1(2.11,39.57) ; v1(2.11,39.57) 2.49,39.57 ; v1(2.11,39.57) 2.11,39.19 ; v1(2.11,39.57) 2.11,39.96 ; v1(43.08,46.74) 43.08,47.12 ; v1(43.08,46.74) 42.69,46.74 ; v1(43.08,46.74) 43.46,46.74 ; 20.88,12.47 v2(21.41,12.47) ; v2(21.41,12.47) 21.41,13.01 ; v2(21.41,12.47) 21.95,12.47 ; v2(21.41,12.47) 21.41,11.94 ; 22.4,60.5 v2(22.4,61.04) ; v2(22.4,61.04) 22.4,61.57 ; v2(22.4,61.04) 22.94,61.04 ; v2(22.4,61.04) 21.87,61.04 ; 31.57,11.94 v2(31.57,12.47) ; v2(31.57,12.47) 31.04,12.47 ; v2(31.57,12.47) 32.11,12.47 ; v2(31.57,12.47) 31.57,13.01 ; v1(62.13,36.58) 62.13,36.96 ; v1(62.13,36.58) 61.74,36.58 ; v1(62.13,36.58) 62.13,36.19 ; v1(62.13,36.58) 62.51,36.58 ; v2(17.32,61.04) 17.32,61.57 ; v2(17.32,61.04) 16.79,61.04 ; v2(17.32,61.04) 17.32,60.5 ; v2(17.32,61.04) 17.86,61.04 ; v1(20.4,46.89) 20.78,46.89 ; v1(20.4,46.89) 20.01,46.89 ; v1(20.4,46.89) 20.4,47.27 ; v1(20.4,46.89) 20.4,46.5 ; v1(50.98,9.53) 50.98,9.91 ; v1(50.98,9.53) 51.36,9.53 ; v1(50.98,9.53) 50.59,9.53 ; v1(50.98,9.53) 50.98,9.14 ; 49.63,53.75 v1(50.01,53.75) ; v1(50.01,53.75) 50.01,54.13 ; v1(50.01,53.75) 50.4,53.75 ; v1(50.01,53.75) 50.01,53.36 ; v2(10.9,10.03) 11.43,10.03 ; v2(10.9,10.03) 10.36,10.03 ; v2(10.9,10.03) 10.9,9.5 ; v2(10.9,10.03) 10.9,10.57 ; v2(10.9,12.57) 11.43,12.57 ; v2(10.9,12.57) 10.36,12.57 ; v2(10.9,12.57) 10.9,13.11 ; v2(10.9,12.57) 10.9,12.04 ; 11.71,58.5 v2(12.24,58.5) ; v2(12.24,58.5) 12.78,58.5 ; v2(12.24,58.5) 12.24,57.96 ; v2(12.24,58.5) 12.24,59.03 ; 61.74,12.19 v1(62.13,12.19) ; v1(62.13,12.19) 62.13,11.81 ; v1(62.13,12.19) 62.51,12.19 ; v1(62.13,12.19) 62.13,12.58 ; v1(30.38,55.47) 30.38,55.86 ; v1(30.38,55.47) 30.76,55.47 ; v1(30.38,55.47) 30.38,55.09 ; v1(30.38,55.47) 29.99,55.47 ; 33.1,46.5 v1(33.1,46.89) ; v1(33.1,46.89) 32.71,46.89 ; v1(33.1,46.89) 33.48,46.89 ; v1(33.1,46.89) 33.1,47.27 ; R53.2 3.94,30.56 ; R53.2 3.38,31.14 ; R53.2 3.38,29.97 ; R53.2 2.82,30.56 ; 56.9,59.42 J1.1 ; J1.1 58.43,60.2 ; J1.1 55.36,60.2 ; J1.1 56.9,60.98 ; R21.2 3.94,24.56 ; R21.2 3.38,25.15 ; R21.2 3.38,23.98 ; R21.2 2.82,24.56 ; 56.26,48.9 56.84,48.9 ; 56.26,48.9 56.26,49.48 ; 56.26,48.9 56.26,48.31 ; 56.26,48.9 v1(55.53,48.9) ; 10.39,46.71 v1(10.77,46.71) ; v1(10.77,46.71) 11.15,46.71 ; v1(10.77,46.71) 10.77,47.09 ; v2(34.11,12.47) 34.11,13.01 ; v2(34.11,12.47) 33.58,12.47 ; v2(34.11,12.47) 34.11,11.94 ; v2(34.11,12.47) 34.65,12.47 ; 30.61,48.79 v1(30.61,49.17) ; v1(30.61,49.17) 30.61,49.56 ; v1(30.61,49.17) 30.22,49.17 ; v1(30.61,49.17) 30.99,49.17 ; v1(55.55,10.79) 55.55,11.18 ; v1(55.55,10.79) 56.26,10.79 ; v1(55.55,10.79) 55.17,10.79 ; v1(55.55,10.79) 55.55,10.41 ; 50.67,14.76 v1(51.05,14.76) ; v1(51.05,14.76) 51.05,15.14 ; v1(51.05,14.76) 51.44,14.76 ; v1(51.05,14.76) 51.05,14.37 ; 8.66,49.28 v1(9.04,49.28) ; v1(9.04,49.28) 9.04,48.89 ; v1(9.04,49.28) 9.43,49.28 ; v1(9.04,49.28) 9.04,49.66 ; J1.A14 57.53,25.35 ; J1.A14 57.53,24.18 ; J1.A14 56.95,24.77 ; v1(62.13,22.86) 62.13,23.24 ; v1(62.13,22.86) 62.13,22.48 ; v1(62.13,22.86) 61.74,22.86 ; v1(62.13,22.86) 62.51,22.86 ; 7.64,48.62 v1(8.03,48.62) ; v1(8.03,48.62) 8.41,48.62 ; v1(8.03,48.62) 8.03,48.23 ; v1(8.03,48.62) 8.03,49 ; v2(3.28,10.03) 3.28,10.57 ; v2(3.28,10.03) 3.28,9.5 ; v2(3.28,10.03) 2.74,10.03 ; v2(3.28,10.03) 3.81,10.03 ; 11.71,61.04 v2(12.24,61.04) ; v2(12.24,61.04) 12.24,60.5 ; v2(12.24,61.04) 12.78,61.04 ; v2(12.24,61.04) 12.24,61.57 ; v1(47.4,9.32) 47.78,9.32 ; v1(47.4,9.32) 47.01,9.32 ; v1(47.4,9.32) 47.4,9.71 ; v1(47.4,9.32) 47.4,8.94 ; 61.74,30.48 v1(62.13,30.48) ; v1(62.13,30.48) 62.13,30.1 ; v1(62.13,30.48) 62.51,30.48 ; v1(62.13,30.48) 62.13,30.86 ; 25.14,49.17 v1(25.53,49.17) ; v1(25.53,49.17) 25.53,48.79 ; v1(25.53,49.17) 25.91,49.17 ; v1(25.53,49.17) 25.53,49.56 ; 24.41,61.04 v2(24.94,61.04) ; v2(24.94,61.04) 24.94,61.57 ; v2(24.94,61.04) 24.94,60.5 ; v2(24.94,61.04) 25.48,61.04 ; 16.79,63.58 v2(17.32,63.58) ; v2(17.32,63.58) 17.32,64.11 ; v2(17.32,63.58) 17.32,63.04 ; v2(17.32,63.58) 17.86,63.58 ; v1(8,47.52) 8.38,47.52 ; v1(8,47.52) 8,47.14 ; v1(8,47.52) 7.62,47.52 ; v1(8,47.52) 8,47.91 ; v1(31.98,2.46) 31.98,2.85 ; v1(31.98,2.46) 31.98,2.08 ; v1(31.98,2.46) 32.36,2.46 ; v1(31.98,2.46) 31.6,2.46 ; v1(62.13,27.43) 62.51,27.43 ; v1(62.13,27.43) 62.13,27.05 ; v1(62.13,27.43) 61.74,27.43 ; v1(62.13,27.43) 62.13,27.82 ; 29.95,17.27 v1(29.95,17.65) ; v1(29.95,17.65) 30.33,17.65 ; v1(29.95,17.65) 29.95,18.04 ; v1(29.95,17.65) 29.56,17.65 ; 62.13,20.95 v1(62.13,21.34) ; v1(62.13,21.34) 62.13,21.72 ; v1(62.13,21.34) 62.51,21.34 ; v1(62.13,21.34) 61.74,21.34 ; 56.26,33.07 J1.B21 ; J1.B21 v1(55.4,33.66) ; J1.B21 56.26,34.24 ; J1.B21 56.84,33.66 ; R61.2 3.94,32.08 ; R61.2 3.38,31.49 ; R61.2 2.82,32.08 ; R61.2 3.38,32.67 ; 56.26,10.79 56.84,10.79 ; 56.26,10.79 56.26,11.38 ; 56.26,10.79 56.26,10.21 ; 20.88,9.93 v2(21.41,9.93) ; v2(21.41,9.93) 21.41,9.4 ; v2(21.41,9.93) 21.95,9.93 ; v2(21.41,9.93) 21.41,10.47 ; 1.72,24.33 v1(2.11,24.33) ; v1(2.11,24.33) 2.11,24.72 ; v1(2.11,24.33) 2.11,23.95 ; v1(2.11,24.33) 2.49,24.33 ; 9.7,63.04 v2(9.7,63.58) ; v2(9.7,63.58) 9.17,63.58 ; v2(9.7,63.58) 10.24,63.58 ; v2(9.7,63.58) 9.7,64.11 ; 56.26,7.67 56.26,8.26 ; 56.26,8.26 56.26,8.84 ; 56.26,8.26 56.84,8.26 ; 32.1,17.65 v1(32.49,17.65) ; v1(32.49,17.65) 32.49,17.27 ; v1(32.49,17.65) 32.49,18.04 ; v1(32.49,17.65) 32.87,17.65 ; v1(15.37,49.17) 15.75,49.17 ; v1(15.37,49.17) 14.98,49.17 ; v1(15.37,49.17) 15.37,49.56 ; v1(15.37,49.17) 15.37,48.79 ; v1(35.03,17.65) 35.41,17.65 ; v1(35.03,17.65) 35.03,18.04 ; v1(35.03,17.65) 34.64,17.65 ; v1(35.03,17.65) 35.03,17.27 ; v2(5.82,12.57) 5.82,13.11 ; v2(5.82,12.57) 6.35,12.57 ; v2(5.82,12.57) 5.28,12.57 ; v2(5.82,12.57) 5.82,12.04 ; v1(62.13,28.96) 62.13,29.34 ; v1(62.13,28.96) 62.13,28.57 ; v1(62.13,28.96) 62.51,28.96 ; v1(62.13,28.96) 61.74,28.96 ; R6.2 3.94,33.58 ; R6.2 3.38,34.17 ; R6.2 2.82,33.58 ; R6.2 3.38,32.99 ; 61.47,8.26 v1(61.85,8.26) ; v1(61.85,8.26) 61.85,8.64 ; v1(61.85,8.26) 62.23,8.26 ; v1(61.85,8.26) 61.85,7.87 ; 2.69,18.72 v2(2.69,19.25) ; v2(2.69,19.25) 2.16,19.25 ; v2(2.69,19.25) 3.23,19.25 ; v2(2.69,19.25) 2.69,19.79 ; v1(48.13,15.39) 48.13,15.78 ; v1(48.13,15.39) 47.75,15.39 ; v1(48.13,15.39) 48.52,15.39 ; v1(48.13,15.39) 48.13,15.01 ; J1.4 62.3,6.62 ; J1.4 60.76,5.84 ; J1.4 62.3,5.06 ; 62.13,24 v1(62.13,24.38) ; v1(62.13,24.38) 62.51,24.38 ; v1(62.13,24.38) 61.74,24.38 ; v1(62.13,24.38) 62.13,24.77 ; 16.79,58.5 v2(17.32,58.5) ; v2(17.32,58.5) 17.32,59.03 ; v2(17.32,58.5) 17.32,57.96 ; v2(17.32,58.5) 17.86,58.5 ; 47.5,51.46 v1(47.88,51.46) ; v1(47.88,51.46) 47.88,51.08 ; v1(47.88,51.46) 47.88,51.84 ; v1(47.88,51.46) 48.26,51.46 ; v1(58.52,9.53) 58.91,9.53 ; v1(58.52,9.53) 58.52,9.14 ; v1(58.52,9.53) 58.52,9.91 ; v1(21.77,2.84) 21.77,3.23 ; v1(21.77,2.84) 21.77,2.46 ; v1(21.77,2.84) 21.38,2.84 ; v1(21.77,2.84) 22.15,2.84 ; v1(12.17,47.47) 12.55,47.47 ; v1(12.17,47.47) 12.17,47.86 ; v1(12.17,47.47) 12.17,47.09 ; v1(12.17,47.47) 11.78,47.47 ; 19.79,17.27 v1(19.79,17.65) ; v1(19.79,17.65) 19.4,17.65 ; v1(19.79,17.65) 19.79,18.04 ; v1(19.79,17.65) 20.17,17.65 ; v1(52.17,8.33) 52.17,8.71 ; v1(52.17,8.33) 51.79,8.33 ; v1(52.17,8.33) 52.17,7.95 ; v1(52.17,8.33) 52.56,8.33 ; 37.57,17.27 v1(37.57,17.65) ; v1(37.57,17.65) 37.95,17.65 ; v1(37.57,17.65) 37.57,18.04 ; v1(37.57,17.65) 37.18,17.65 ; v1(17.25,17.65) 17.63,17.65 ; v1(17.25,17.65) 17.25,18.04 ; v1(17.25,17.65) 16.86,17.65 ; v1(17.25,17.65) 17.25,17.27 ; 24.94,63.04 v2(24.94,63.58) ; v2(24.94,63.58) 24.94,64.11 ; v2(24.94,63.58) 25.48,63.58 ; v2(24.94,63.58) 24.41,63.58 ; 1.72,42.11 v1(2.11,42.11) ; v1(2.11,42.11) 2.11,42.5 ; v1(2.11,42.11) 2.49,42.11 ; v1(2.11,42.11) 2.11,41.73
  BOTTOM w0.152: 27.2,55.09 v1(27.2,55.47) ; v1(27.2,55.47) 27.2,55.86 ; v1(27.2,55.47) 26.82,55.47 ; v1(27.2,55.47) 27.59,55.47 ; v1(24.82,19.68) 24.82,20.07 ; v1(24.82,19.68) 24.82,19.3 ; v1(24.82,19.68) 24.43,19.68 ; v1(24.82,19.68) 25.2,19.68 ; 41.2,12.47 v2(41.73,12.47) ; v2(41.73,12.47) 42.27,12.47 ; v2(41.73,12.47) 41.73,11.94 ; v2(41.73,12.47) 41.73,13.01 ; v1(23.65,52.25) 24.03,52.25 ; v1(23.65,52.25) 23.65,51.86 ; v1(23.65,52.25) 23.26,52.25 ; v1(23.65,52.25) 23.65,52.63 ; R47.2 v1(62.13,27.43) ; R47.2 61.19,26.85 ; R47.2 61.19,28.02 ; R47.2 60.63,27.43 ; v1(62.13,27.43) 62.51,27.43 ; v1(62.13,27.43) 62.13,27.05 ; v1(62.13,27.43) 62.13,27.82 ; 61.19,43.61 R28.2 ; R28.2 61.19,44.78 ; R28.2 60.63,44.2 ; R28.2 v1(62.13,44.2) ; 6.83,43.77 U1.84 8.29,43.77 ; 49.68,16.1 v1(50.06,16.1) ; v1(50.06,16.1) 50.45,16.1 ; v1(50.06,16.1) 50.06,15.72 ; v1(50.06,16.1) 50.06,16.49 ; 21.87,63.58 v2(22.4,63.58) ; v2(22.4,63.58) 22.94,63.58 ; v2(22.4,63.58) 22.4,64.11 ; v2(22.4,63.58) 22.4,63.04 ; v2(34.11,9.93) 34.65,9.93 ; v2(34.11,9.93) 33.58,9.93 ; v2(34.11,9.93) 34.11,10.47 ; v2(34.11,9.93) 34.11,9.4 ; 8.79,36.83 v1(9.17,36.83) ; v1(9.17,36.83) 9.17,36.45 ; v1(9.17,36.83) 9.55,36.83 ; v1(9.17,36.83) 9.17,37.21 ; v1(27.41,17.65) 27.79,17.65 ; v1(27.41,17.65) 27.41,17.27 ; v1(27.41,17.65) 27.02,17.65 ; v1(27.41,17.65) 27.41,18.04 ; v1(35.03,17.65) 35.41,17.65 ; v1(35.03,17.65) 34.64,17.65 ; v1(35.03,17.65) 35.03,17.27 ; v1(35.03,17.65) 35.03,18.04 ; v1(30.56,46.89) 30.56,47.27 ; v1(30.56,46.89) 30.94,46.89 ; v1(30.56,46.89) 30.17,46.89 ; v1(30.56,46.89) 30.56,46.5 ; v1(2.11,42.11) 2.11,42.5 ; v1(2.11,42.11) 2.49,42.11 ; v1(2.11,42.11) 1.72,42.11 ; v1(2.11,42.11) 2.11,41.73 ; 60.63,12.19 R8.2 ; R8.2 v1(62.13,12.19) ; R8.2 61.19,12.78 ; R8.2 61.19,11.61 ; 47.5,51.46 v1(47.88,51.46) ; v1(47.88,51.46) 47.88,51.08 ; v1(47.88,51.46) 48.26,51.46 ; v1(47.88,51.46) 47.88,51.84 ; 37.56,62.08 v1(37.95,62.08) ; v1(37.95,62.08) 38.33,62.08 ; v1(37.95,62.08) 37.95,62.46 ; v1(37.95,62.08) 37.95,61.69 ; v1(62.13,44.2) 62.51,44.2 ; v1(62.13,44.2) 62.13,43.81 ; v1(62.13,44.2) 62.13,44.58 ; 17.52,49.17 v1(17.91,49.17) ; v1(17.91,49.17) 17.91,48.79 ; v1(17.91,49.17) 18.29,49.17 ; v1(17.91,49.17) 17.91,49.56 ; 17.32,60.5 v2(17.32,61.04) ; v2(17.32,61.04) 16.79,61.04 ; v2(17.32,61.04) 17.32,61.57 ; v2(17.32,61.04) 17.86,61.04 ; 20.24,55.6 v1(20.62,55.6) ; v1(20.62,55.6) 20.62,55.98 ; v1(20.62,55.6) 21.01,55.6 ; v1(20.62,55.6) 20.62,55.22 ; v1(40.28,17.73) 40.67,17.73 ; v1(40.28,17.73) 40.28,18.11 ; v1(40.28,17.73) 39.9,17.73 ; v1(40.28,17.73) 40.28,17.35 ; 48.77,16.89 v1(49.15,16.89) ; v1(49.15,16.89) 49.15,16.51 ; v1(49.15,16.89) 49.15,17.27 ; v1(49.15,16.89) 49.53,16.89 ; 55.17,10.79 v1(55.55,10.79) ; v1(55.55,10.79) 55.93,10.79 ; v1(55.55,10.79) 55.55,10.41 ; v1(55.55,10.79) 55.55,11.18 ; v1(20.8,52.17) 20.8,52.56 ; v1(20.8,52.17) 21.19,52.17 ; v1(20.8,52.17) 20.8,51.79 ; v1(20.8,52.17) 20.42,52.17 ; v2(26.49,12.47) 26.49,13.01 ; v2(26.49,12.47) 26.49,11.94 ; v2(26.49,12.47) 27.03,12.47 ; v2(26.49,12.47) 25.96,12.47 ; 1.72,31.95 v1(2.11,31.95) ; v1(2.11,31.95) 2.49,31.95 ; v1(2.11,31.95) 2.11,32.34 ; v1(2.11,31.95) 2.11,31.57 ; 21.87,58.5 v2(22.4,58.5) ; v2(22.4,58.5) 22.4,57.96 ; v2(22.4,58.5) 22.94,58.5 ; v2(22.4,58.5) 22.4,59.03 ; v1(42.37,17.73) 42.37,18.11 ; v1(42.37,17.73) 42.37,17.35 ; v1(42.37,17.73) 41.98,17.73 ; v1(42.37,17.73) 42.75,17.73 ; v1(29.9,19.68) 30.28,19.68 ; v1(29.9,19.68) 29.9,20.07 ; v1(29.9,19.68) 29.51,19.68 ; v1(29.9,19.68) 29.9,19.3 ; 50.98,9.14 v1(50.98,9.53) ; v1(50.98,9.53) 50.59,9.53 ; v1(50.98,9.53) 51.36,9.53 ; v1(50.98,9.53) 50.98,9.91 ; v1(2.11,30.68) 2.49,30.68 ; v1(2.11,30.68) 2.11,31.07 ; v1(2.11,30.68) 1.72,30.68 ; v1(2.11,30.68) 2.11,30.3 ; v1(43.08,46.74) 43.08,47.12 ; v1(43.08,46.74) 43.46,46.74 ; v1(43.08,46.74) 42.69,46.74 ; v1(2.11,24.33) 2.11,24.72 ; v1(2.11,24.33) 1.72,24.33 ; v1(2.11,24.33) 2.11,23.95 ; v1(2.11,24.33) 2.49,24.33 ; 25.09,46.89 v1(25.48,46.89) ; v1(25.48,46.89) 25.48,46.5 ; v1(25.48,46.89) 25.86,46.89 ; v1(25.48,46.89) 25.48,47.27 ; 3.38,34.9 R18.2 ; R18.2 3.94,35.48 ; R18.2 2.82,35.48 ; R18.2 3.38,36.07 ; 31.04,9.93 v2(31.57,9.93) ; v2(31.57,9.93) 31.57,10.47 ; v2(31.57,9.93) 32.11,9.93 ; v2(31.57,9.93) 31.57,9.4 ; v2(39.19,15.01) 39.73,15.01 ; v2(39.19,15.01) 39.19,14.48 ; v2(39.19,15.01) 38.66,15.01 ; v2(39.19,15.01) 39.19,15.55 ; 3.38,25.98 R33.2 ; R33.2 3.38,27.16 ; R33.2 3.94,26.57 ; R33.2 2.82,26.57 ; v1(62.13,21.34) 62.13,21.72 ; v1(62.13,21.34) R31.2 ; v1(62.13,21.34) 62.51,21.34 ; v1(62.13,21.34) 62.13,20.95 ; R2.2 v1(62.13,36.58) ; R2.2 61.19,37.16 ; R2.2 61.19,35.99 ; R2.2 60.63,36.58 ; v1(62.13,36.58) 62.13,36.19 ; v1(62.13,36.58) 62.51,36.58 ; v1(62.13,36.58) 62.13,36.96 ; R20.2 v1(62.13,41.15) ; R20.2 61.19,40.56 ; R20.2 60.63,41.15 ; R20.2 61.19,41.73 ; v1(62.13,41.15) 62.51,41.15 ; v1(62.13,41.15) 62.13,41.53 ; v1(62.13,41.15) 62.13,40.76 ; R43.2 61.19,26.49 ; R43.2 v1(62.13,25.91) ; R43.2 60.63,25.91 ; R43.2 61.19,25.32 ; 32.79,57.61 v1(33.17,57.61) ; v1(33.17,57.61) 33.17,57.99 ; v1(33.17,57.61) 33.56,57.61 ; v1(33.17,57.61) 33.17,57.22 ; 2.11,29.03 v1(2.11,29.41) ; v1(2.11,29.41) 2.11,29.8 ; v1(2.11,29.41) 1.72,29.41 ; v1(2.11,29.41) 2.49,29.41 ; 3.38,24.48 R25.2 ; R25.2 3.38,25.66 ; R25.2 2.82,25.07 ; R25.2 3.94,25.07 ; v1(2.11,20.52) 2.49,20.52 ; v1(2.11,20.52) 2.11,20.14 ; v1(2.11,20.52) 2.11,20.91 ; v1(2.11,20.52) 1.72,20.52 ; 62.13,54.48 v1(62.13,54.86) ; v1(62.13,54.86) 62.13,55.25 ; v1(62.13,54.86) R56.2 ; v1(62.13,54.86) 62.51,54.86 ; 27.48,60.5 v2(27.48,61.04) ; v2(27.48,61.04) 26.95,61.04 ; v2(27.48,61.04) 28.02,61.04 ; v2(27.48,61.04) 27.48,61.57 ; v1(38.73,57.43) 38.73,57.81 ; v1(38.73,57.43) 39.12,57.43 ; v1(38.73,57.43) 38.73,57.05 ; v1(38.73,57.43) 38.35,57.43 ; 3.38,36.47 R26.2 ; R26.2 3.38,37.65 ; R26.2 3.94,37.06 ; R26.2 2.82,37.06 ; 48.94,14.22 v1(49.33,14.22) ; v1(49.33,14.22) 49.33,14.61 ; v1(49.33,14.22) 49.33,13.84 ; v1(49.33,14.22) 49.71,14.22 ; 33.58,12.47 v2(34.11,12.47) ; v2(34.11,12.47) 34.65,12.47 ; v2(34.11,12.47) 34.11,13.01 ; v2(34.11,12.47) 34.11,11.94 ; 12.24,63.04 v2(12.24,63.58) ; v2(12.24,63.58) 12.78,63.58 ; v2(12.24,63.58) 12.24,64.11 ; v2(12.24,63.58) 11.71,63.58 ; 2.61,17.53 v2(3.15,17.53) ; v2(3.15,17.53) 3.69,17.53 ; v2(3.15,17.53) 3.15,16.99 ; v2(3.15,17.53) 3.15,18.06 ; 8.76,46.71 v1(9.14,46.71) ; v1(9.14,46.71) 9.14,46.33 ; v1(9.14,46.71) 9.53,46.71 ; 21.77,2.46 v1(21.77,2.84) ; v1(21.77,2.84) 21.77,3.23 ; v1(21.77,2.84) 22.15,2.84 ; v1(21.77,2.84) 21.38,2.84 ; 46.71,17.24 v1(46.71,17.63) ; v1(46.71,17.63) 46.71,18.01 ; v1(46.71,17.63) 46.33,17.63 ; v1(46.71,17.63) 47.09,17.63 ; 10.77,46.33 v1(10.77,46.71) ; v1(10.77,46.71) 11.15,46.71 ; v1(10.77,46.71) 10.39,46.71 ; 51.56,13.61 v1(51.94,13.61) ; v1(51.94,13.61) 51.94,14 ; v1(51.94,13.61) 51.94,13.23 ; v1(51.94,13.61) 52.33,13.61 ; 61.19,52.75 R52.2 ; R52.2 61.19,53.93 ; R52.2 60.63,53.34 ; R52.2 v1(62.13,53.34) ; 3.38,39.47 R42.2 ; R42.2 3.94,40.06 ; R42.2 3.38,40.64 ; R42.2 2.82,40.06 ; 35.64,46.5 v1(35.64,46.89) ; v1(35.64,46.89) 35.64,47.27 ; v1(35.64,46.89) 35.25,46.89 ; v1(35.64,46.89) 36.02,46.89 ; 55.12,8.26 v1(55.5,8.26) ; v1(55.5,8.26) 55.5,8.64 ; v1(55.5,8.26) 55.88,8.26 ; v1(55.5,8.26) 55.5,7.87 ; v1(19.74,19.68) 19.74,20.07 ; v1(19.74,19.68) 19.35,19.68 ; v1(19.74,19.68) 20.12,19.68 ; v1(19.74,19.68) 19.74,19.3 ; v1(22.94,46.89) 23.32,46.89 ; v1(22.94,46.89) 22.55,46.89 ; v1(22.94,46.89) 22.94,46.5 ; v1(22.94,46.89) 22.94,47.27 ; v2(22.4,61.04) 22.94,61.04 ; v2(22.4,61.04) 21.87,61.04 ; v2(22.4,61.04) 22.4,60.5 ; v2(22.4,61.04) 22.4,61.57 ; v1(14.66,19.68) 15.04,19.68 ; v1(14.66,19.68) 14.27,19.68 ; v1(14.66,19.68) 14.66,20.07 ; v1(14.66,19.68) 14.66,19.3 ; v2(9.7,63.58) 9.7,64.11 ; v2(9.7,63.58) 9.17,63.58 ; v2(9.7,63.58) 10.24,63.58 ; v2(9.7,63.58) 9.7,63.04 ; 60.63,48.77 R40.2 ; R40.2 61.19,49.35 ; R40.2 v1(62.13,48.77) ; R40.2 61.19,48.18 ; 10.16,46.99 U1.B2 ; U1.B2 8.43,47.97 ; U1.B2 11.89,47.97 ; U1.B2 10.16,48.95 ; v2(13.44,10.03) 13.44,10.57 ; v2(13.44,10.03) 13.44,9.5 ; v2(13.44,10.03) 12.9,10.03 ; v2(13.44,10.03) 13.97,10.03 ; v1(54.05,11.84) 54.05,12.22 ; v1(54.05,11.84) 53.67,11.84 ; v1(54.05,11.84) 54.05,11.45 ; v1(54.05,11.84) 54.43,11.84 ; v1(10.85,22.3) 11.23,22.3 ; v1(10.85,22.3) 10.46,22.3 ; v1(10.85,22.3) 10.85,22.68 ; v1(10.85,22.3) 10.85,21.92 ; 62.13,13.33 v1(62.13,13.72) ; v1(62.13,13.72) R11.2 ; v1(62.13,13.72) 62.13,14.1 ; v1(62.13,13.72) 62.51,13.72 ; R51.2 61.19,29.54 ; R51.2 60.63,28.96 ; R51.2 v1(62.13,28.96) ; R51.2 61.19,28.37 ; 61.19,45.13 R32.2 ; R32.2 60.63,45.72 ; R32.2 61.19,46.31 ; R32.2 v1(62.13,45.72) ; v1(48.08,18.14) 48.47,18.14 ; v1(48.08,18.14) 48.08,18.52 ; v1(48.08,18.14) 48.08,17.75 ; v1(48.08,18.14) 47.7,18.14 ; 51.05,14.37 v1(51.05,14.76) ; v1(51.05,14.76) 50.67,14.76 ; v1(51.05,14.76) 51.05,15.14 ; v1(51.05,14.76) 51.44,14.76 ; v2(10.9,15.11) 10.9,15.65 ; v2(10.9,15.11) 11.43,15.11 ; v2(10.9,15.11) 10.9,14.58 ; v2(10.9,15.11) 10.36,15.11 ; v2(8.36,15.11) 8.89,15.11 ; v2(8.36,15.11) 8.36,15.65 ; v2(8.36,15.11) 7.82,15.11 ; v2(8.36,15.11) 8.36,14.58 ; v1(62.13,22.86) 62.51,22.86 ; v1(62.13,22.86) 62.13,22.48 ; v1(62.13,22.86) 62.13,23.24 ; v1(62.13,22.86) R35.2 ; 37.79,46.89 v1(38.18,46.89) ; v1(38.18,46.89) 38.18,47.27 ; v1(38.18,46.89) 38.56,46.89 ; v1(38.18,46.89) 38.18,46.5 ; 45.57,48.87 v1(45.57,49.25) ; v1(45.57,49.25) 45.18,49.25 ; v1(45.57,49.25) 45.57,49.63 ; v1(45.57,49.25) 45.95,49.25 ; v1(62.13,48.77) 62.51,48.77 ; v1(62.13,48.77) 62.13,48.38 ; v1(62.13,48.77) 62.13,49.15 ; v1(34.57,5.18) 34.95,5.18 ; v1(34.57,5.18) 34.19,5.18 ; v1(34.57,5.18) 34.57,4.8 ; v1(34.57,5.18) 34.57,5.57 ; 60.63,24.38 R39.2 ; R39.2 61.19,24.97 ; R39.2 61.19,23.8 ; R39.2 v1(62.13,24.38) ; v1(30.61,49.17) 30.99,49.17 ; v1(30.61,49.17) 30.22,49.17 ; v1(30.61,49.17) 30.61,48.79 ; v1(30.61,49.17) 30.61,49.56 ; v2(21.41,9.93) 21.41,10.47 ; v2(21.41,9.93) 21.41,9.4 ; v2(21.41,9.93) 20.88,9.93 ; v2(21.41,9.93) 21.95,9.93 ; 6.83,40.27 U1.72 8.29,40.27 ; 23.39,55.29 v1(23.39,55.68) ; v1(23.39,55.68) 23.01,55.68 ; v1(23.39,55.68) 23.39,56.06 ; v1(23.39,55.68) 23.78,55.68 ; 61.19,37.51 R12.2 ; R12.2 60.63,38.1 ; R12.2 v1(62.13,38.1) ; R12.2 61.19,38.69 ; R10.2 3.38,34.57 ; R10.2 2.82,33.99 ; R10.2 3.38,33.4 ; R10.2 3.94,33.99 ; v1(37.52,19.68) 37.9,19.68 ; v1(37.52,19.68) 37.13,19.68 ; v1(37.52,19.68) 37.52,20.07 ; v1(37.52,19.68) 37.52,19.3 ; v1(29.95,17.65) 30.33,17.65 ; v1(29.95,17.65) 29.95,18.04 ; v1(29.95,17.65) 29.95,17.27 ; v1(29.95,17.65) 29.56,17.65 ; 32.76,49.17 v1(33.15,49.17) ; v1(33.15,49.17) 33.53,49.17 ; v1(33.15,49.17) 33.15,49.56 ; v1(33.15,49.17) 33.15,48.79 ; R7.1 v1(61.85,8.26) ; R7.1 60.78,8.84 ; R7.1 60.22,8.26 ; R7.1 60.78,7.67 ; v1(61.85,8.26) 61.85,8.64 ; v1(61.85,8.26) 62.23,8.26 ; v1(61.85,8.26) 61.85,7.87 ; 2.82,43.05 R58.2 ; R58.2 3.38,43.64 ; R58.2 3.38,42.47 ; R58.2 3.94,43.05 ; R56.2 61.19,54.28 ; R56.2 60.63,54.86 ; R56.2 61.19,55.45 ; v1(10.95,49.3) 10.95,49.68 ; v1(10.95,49.3) 11.33,49.3 ; v1(10.95,49.3) 10.56,49.3 ; 27.36,19.3 v1(27.36,19.68) ; v1(27.36,19.68) 27.36,20.07 ; v1(27.36,19.68) 26.97,19.68 ; v1(27.36,19.68) 27.74,19.68 ; v1(32.44,19.68) 32.82,19.68 ; v1(32.44,19.68) 32.44,20.07 ; v1(32.44,19.68) 32.44,19.3 ; v1(32.44,19.68) 32.05,19.68 ; R34.2 3.38,39.14 ; R34.2 3.38,37.97 ; R34.2 3.94,38.56 ; R34.2 2.82,38.56 ; v2(7.11,18.14) 7.65,18.14 ; v2(7.11,18.14) 7.11,17.6 ; v2(7.11,18.14) 6.58,18.14 ; v2(7.11,18.14) 7.11,18.67 ; 60.63,33.53 R63.2 ; R63.2 61.19,34.11 ; R63.2 61.19,32.94 ; R63.2 v1(62.13,33.53) ; v2(26.49,15.01) 27.03,15.01 ; v2(26.49,15.01) 25.96,15.01 ; v2(26.49,15.01) 26.49,14.48 ; v2(26.49,15.01) 26.49,15.55 ; v2(39.19,9.93) 39.73,9.93 ; v2(39.19,9.93) 39.19,10.47 ; v2(39.19,9.93) 39.19,9.4 ; v2(39.19,9.93) 38.66,9.93 ; v1(20.45,49.17) 20.45,49.56 ; v1(20.45,49.17) 20.06,49.17 ; v1(20.45,49.17) 20.45,48.79 ; v1(20.45,49.17) 20.83,49.17 ; v1(62.13,10.67) 62.51,10.67 ; v1(62.13,10.67) 62.13,11.05 ; v1(62.13,10.67) 62.13,10.28 ; v1(62.13,10.67) R1.2 ; v1(33.5,62.08) 33.89,62.08 ; v1(33.5,62.08) 33.12,62.08 ; v1(33.5,62.08) 33.5,62.46 ; v1(33.5,62.08) 33.5,61.69 ; 47.75,15.39 v1(48.13,15.39) ; v1(48.13,15.39) 48.52,15.39 ; v1(48.13,15.39) 48.13,15.01 ; v1(48.13,15.39) 48.13,15.78 ; 31.98,2.08 v1(31.98,2.46) ; v1(31.98,2.46) 31.98,2.85 ; v1(31.98,2.46) 32.36,2.46 ; v1(31.98,2.46) 31.6,2.46 ; 16.79,58.5 v2(17.32,58.5) ; v2(17.32,58.5) 17.86,58.5 ; v2(17.32,58.5) 17.32,57.96 ; v2(17.32,58.5) 17.32,59.03 ; v1(30.38,55.47) 30.76,55.47 ; v1(30.38,55.47) 30.38,55.86 ; v1(30.38,55.47) 30.38,55.09 ; v1(30.38,55.47) 29.99,55.47 ; v1(22.33,17.65) 22.33,18.04 ; v1(22.33,17.65) 21.94,17.65 ; v1(22.33,17.65) 22.71,17.65 ; v1(22.33,17.65) 22.33,17.27 ; 1.72,23.06 v1(2.11,23.06) ; v1(2.11,23.06) 2.11,23.45 ; v1(2.11,23.06) 2.11,22.68 ; v1(2.11,23.06) 2.49,23.06 ; 26.49,9.4 v2(26.49,9.93) ; v2(26.49,9.93) 25.96,9.93 ; v2(26.49,9.93) 26.49,10.47 ; v2(26.49,9.93) 27.03,9.93 ; 16.81,19.68 v1(17.2,19.68) ; v1(17.2,19.68) 17.2,19.3 ; v1(17.2,19.68) 17.58,19.68 ; v1(17.2,19.68) 17.2,20.07 ; R41.2 3.94,28.07 ; R41.2 3.38,28.65 ; R41.2 3.38,27.48 ; R41.2 2.82,28.07 ; 37.84,49.17 v1(38.23,49.17) ; v1(38.23,49.17) 38.23,49.56 ; v1(38.23,49.17) 38.23,48.79 ; v1(38.23,49.17) 38.61,49.17 ; v2(18.87,12.47) 18.87,13.01 ; v2(18.87,12.47) 18.34,12.47 ; v2(18.87,12.47) 19.41,12.47 ; v2(18.87,12.47) 18.87,11.94 ; v2(24.94,58.5) 24.94,59.03 ; v2(24.94,58.5) 24.94,57.96 ; v2(24.94,58.5) 25.48,58.5 ; v2(24.94,58.5) 24.41,58.5 ; 3.38,21.21 R9.2 ; R9.2 2.82,21.79 ; R9.2 3.94,21.79 ; R9.2 3.38,22.38 ; 29.03,14.48 v2(29.03,15.01) ; v2(29.03,15.01) 29.03,15.55 ; v2(29.03,15.01) 29.57,15.01 ; v2(29.03,15.01) 28.5,15.01 ; R64.2 v1(62.13,57.91) ; R64.2 60.63,57.91 ; R64.2 61.19,58.5 ; R64.2 61.19,57.33 ; v1(62.13,57.91) 62.13,57.53 ; v1(62.13,57.91) 62.13,58.3 ; v1(62.13,57.91) 62.51,57.91 ; v1(2.11,26.87) 2.11,27.26 ; v1(2.11,26.87) 2.11,26.49 ; v1(2.11,26.87) 1.72,26.87 ; v1(2.11,26.87) 2.49,26.87 ; v2(34.11,15.01) 34.11,15.55 ; v2(34.11,15.01) 34.65,15.01 ; v2(34.11,15.01) 33.58,15.01 ; v2(34.11,15.01) 34.11,14.48 ; v2(14.78,63.58) 15.32,63.58 ; v2(14.78,63.58) 14.25,63.58 ; v2(14.78,63.58) 14.78,64.11 ; v2(14.78,63.58) 14.78,63.04 ; v2(27.48,58.5) 27.48,59.03 ; v2(27.48,58.5) 26.95,58.5 ; v2(27.48,58.5) 27.48,57.96 ; v2(27.48,58.5) 28.02,58.5 ; v1(34.98,19.68) 34.98,20.07 ; v1(34.98,19.68) 34.59,19.68 ; v1(34.98,19.68) 35.36,19.68 ; v1(34.98,19.68) 34.98,19.3 ; v2(17.32,63.58) 17.86,63.58 ; v2(17.32,63.58) 17.32,63.04 ; v2(17.32,63.58) 16.79,63.58 ; v2(17.32,63.58) 17.32,64.11 ; v1(8.03,48.62) 8.41,48.62 ; v1(8.03,48.62) 8.03,49 ; v1(8.03,48.62) 8.03,48.23 ; v1(8.03,48.62) 7.64,48.62 ; 60.63,30.48 R55.2 ; R55.2 61.19,29.89 ; R55.2 61.19,31.07 ; R55.2 v1(62.13,30.48) ; v1(2.11,39.57) 2.49,39.57 ; v1(2.11,39.57) 1.72,39.57 ; v1(2.11,39.57) 2.11,39.96 ; v1(2.11,39.57) 2.11,39.19 ; v1(14.71,17.65) 15.09,17.65 ; v1(14.71,17.65) 14.71,18.04 ; v1(14.71,17.65) 14.71,17.27 ; v1(14.71,17.65) 14.32,17.65 ; 10.72,41.81 v1(10.72,42.19) ; v1(10.72,42.19) 10.72,42.57 ; v1(10.72,42.19) 11.1,42.19 ; v1(10.72,42.19) 10.34,42.19 ; 3.38,31.9 R65.2 ; R65.2 2.82,32.49 ; R65.2 3.94,32.49 ; R65.2 3.38,33.07 ; 33.1,46.5 v1(33.1,46.89) ; v1(33.1,46.89) 32.71,46.89 ; v1(33.1,46.89) 33.48,46.89 ; v1(33.1,46.89) 33.1,47.27 ; 14.98,49.17 v1(15.37,49.17) ; v1(15.37,49.17) 15.75,49.17 ; v1(15.37,49.17) 15.37,49.56 ; v1(15.37,49.17) 15.37,48.79 ; R11.2 60.63,13.72 ; R11.2 61.19,14.3 ; R11.2 61.19,13.13 ; v1(2.11,43.38) 2.11,43.77 ; v1(2.11,43.38) 1.72,43.38 ; v1(2.11,43.38) 2.11,43 ; v1(2.11,43.38) 2.49,43.38 ; v1(25.53,49.17) 25.53,49.56 ; v1(25.53,49.17) 25.53,48.79 ; v1(25.53,49.17) 25.14,49.17 ; v1(25.53,49.17) 25.91,49.17 ; v2(12.24,58.5) 12.24,59.03 ; v2(12.24,58.5) 12.24,57.96 ; v2(12.24,58.5) 12.78,58.5 ; v2(12.24,58.5) 11.71,58.5 ; R16.2 61.19,40.21 ; R16.2 60.63,39.62 ; R16.2 61.19,39.04 ; R16.2 v1(62.13,39.62) ; 62.13,56 v1(62.13,56.39) ; v1(62.13,56.39) 62.51,56.39 ; v1(62.13,56.39) 62.13,56.77 ; v1(62.13,56.39) R60.2 ; R57.2 3.94,31.09 ; R57.2 3.38,31.68 ; R57.2 2.82,31.09 ; R57.2 3.38,30.5 ; v1(44.73,9.14) 44.73,9.53 ; v1(44.73,9.14) 44.35,9.14 ; v1(44.73,9.14) 45.11,9.14 ; v1(44.73,9.14) 44.73,8.76 ; 39.19,11.94 v2(39.19,12.47) ; v2(39.19,12.47) 39.73,12.47 ; v2(39.19,12.47) 38.66,12.47 ; v2(39.19,12.47) 39.19,13.01 ; v2(14.78,58.5) 14.78,59.03 ; v2(14.78,58.5) 15.32,58.5 ; v2(14.78,58.5) 14.78,57.96 ; v2(14.78,58.5) 14.25,58.5 ; v1(58.52,9.53) 58.91,9.53 ; v1(58.52,9.53) 58.14,9.53 ; v1(58.52,9.53) 58.52,9.14 ; v1(52.15,10.62) 52.53,10.62 ; v1(52.15,10.62) 52.15,11 ; v1(52.15,10.62) 51.76,10.62 ; v1(52.15,10.62) 52.15,10.23 ; R50.2 3.94,41.55 ; R50.2 2.82,41.55 ; R50.2 3.38,40.97 ; R50.2 3.38,42.14 ; 9.7,57.96 v2(9.7,58.5) ; v2(9.7,58.5) 9.17,58.5 ; v2(9.7,58.5) 9.7,59.03 ; v2(9.7,58.5) 10.24,58.5 ; v2(36.65,12.47) 36.65,13.01 ; v2(36.65,12.47) 36.12,12.47 ; v2(36.65,12.47) 37.19,12.47 ; v2(36.65,12.47) 36.65,11.94 ; v1(29.72,5.18) 29.72,5.57 ; v1(29.72,5.18) 30.1,5.18 ; v1(29.72,5.18) 29.33,5.18 ; v1(29.72,5.18) 29.72,4.8 ; 8.79,42.16 v1(9.17,42.16) ; v1(9.17,42.16) 9.55,42.16 ; v1(9.17,42.16) 9.17,42.55 ; v1(9.17,42.16) 9.17,41.78 ; v1(47.4,9.32) 47.78,9.32 ; v1(47.4,9.32) 47.4,9.71 ; v1(47.4,9.32) 47.01,9.32 ; v1(47.4,9.32) 47.4,8.94 ; v1(62.13,24.38) 62.51,24.38 ; v1(62.13,24.38) 62.13,24 ; v1(62.13,24.38) 62.13,24.77 ; 24.94,63.04 v2(24.94,63.58) ; v2(24.94,63.58) 24.94,64.11 ; v2(24.94,63.58) 24.41,63.58 ; v2(24.94,63.58) 25.48,63.58 ; 8.29,25.77 U1.18 6.83,25.77 ; 8.29,37.77 U1.62 6.83,37.77 ; 61.19,22.27 R35.2 ; R35.2 61.19,23.45 ; R35.2 60.63,22.86 ; 23.95,11.94 v2(23.95,12.47) ; v2(23.95,12.47) 23.95,13.01 ; v2(23.95,12.47) 24.49,12.47 ; v2(23.95,12.47) 23.42,12.47 ; v1(11,36.83) 11,37.21 ; v1(11,36.83) 11.38,36.83 ; v1(11,36.83) 10.61,36.83 ; v1(11,36.83) 11,36.45 ; 24.87,17.27 v1(24.87,17.65) ; v1(24.87,17.65) 24.48,17.65 ; v1(24.87,17.65) 24.87,18.04 ; v1(24.87,17.65) 25.25,17.65 ; v1(2.11,38.3) 2.49,38.3 ; v1(2.11,38.3) 1.72,38.3 ; v1(2.11,38.3) 2.11,38.69 ; v1(2.11,38.3) 2.11,37.92 ; 60.63,56.39 R60.2 ; R60.2 61.19,56.97 ; R60.2 61.19,55.8 ; v1(62.13,35.05) 62.51,35.05 ; v1(62.13,35.05) R4.2 ; v1(62.13,35.05) 62.13,35.44 ; v1(62.13,35.05) 62.13,34.67 ; 5.08,17.7 v2(5.08,18.24) ; v2(5.08,18.24) 5.08,18.77 ; v2(5.08,18.24) 4.54,18.24 ; v2(5.08,18.24) 5.62,18.24 ; v1(62.13,18.29) 62.51,18.29 ; v1(62.13,18.29) R23.2 ; v1(62.13,18.29) 62.13,18.67 ; v1(62.13,18.29) 62.13,17.9 ; 2.11,40.46 v1(2.11,40.84) ; v1(2.11,40.84) 2.11,41.23 ; v1(2.11,40.84) 1.72,40.84 ; v1(2.11,40.84) 2.49,40.84 ; 62.13,49.91 v1(62.13,50.29) ; v1(62.13,50.29) R44.2 ; v1(62.13,50.29) 62.13,50.68 ; v1(62.13,50.29) 62.51,50.29 ; 1.72,35.76 v1(2.11,35.76) ; v1(2.11,35.76) 2.11,36.15 ; v1(2.11,35.76) 2.49,35.76 ; v1(2.11,35.76) 2.11,35.38 ; R4.2 61.19,35.64 ; R4.2 61.19,34.47 ; R4.2 60.63,35.05 ; 32.1,17.65 v1(32.49,17.65) ; v1(32.49,17.65) 32.87,17.65 ; v1(32.49,17.65) 32.49,17.27 ; v1(32.49,17.65) 32.49,18.04 ; v2(29.03,9.93) 29.03,10.47 ; v2(29.03,9.93) 29.03,9.4 ; v2(29.03,9.93) 29.57,9.93 ; v2(29.03,9.93) 28.5,9.93 ; 27.48,63.04 v2(27.48,63.58) ; v2(27.48,63.58) 26.95,63.58 ; v2(27.48,63.58) 28.02,63.58 ; v2(27.48,63.58) 27.48,64.11 ; 12.7,17.6 v2(12.7,18.14) ; v2(12.7,18.14) 12.7,18.67 ; v2(12.7,18.14) 12.16,18.14 ; v2(12.7,18.14) 13.24,18.14 ; R23.2 60.63,18.29 ; R23.2 61.19,17.7 ; R23.2 61.19,18.87 ; v2(16.41,12.73) 16.41,13.26 ; v2(16.41,12.73) 15.87,12.73 ; v2(16.41,12.73) 16.41,12.19 ; v2(16.41,12.73) 16.94,12.73 ; v1(62.13,12.19) 62.51,12.19 ; v1(62.13,12.19) 62.13,11.81 ; v1(62.13,12.19) 62.13,12.58 ; 12.03,37.77 U1.61 ; v2(5.82,10.03) 6.35,10.03 ; v2(5.82,10.03) 5.82,10.57 ; v2(5.82,10.03) 5.82,9.5 ; v2(5.82,10.03) 5.28,10.03 ; v1(62.13,51.82) 62.51,51.82 ; v1(62.13,51.82) R48.2 ; v1(62.13,51.82) 62.13,52.2 ; v1(62.13,51.82) 62.13,51.43 ; 10.36,10.03 v2(10.9,10.03) ; v2(10.9,10.03) 10.9,9.5 ; v2(10.9,10.03) 10.9,10.57 ; v2(10.9,10.03) 11.43,10.03 ; 19.79,17.27 v1(19.79,17.65) ; v1(19.79,17.65) 20.17,17.65 ; v1(19.79,17.65) 19.4,17.65 ; v1(19.79,17.65) 19.79,18.04 ; 60.63,16.76 R19.2 ; R19.2 61.19,17.35 ; R19.2 61.19,16.18 ; R19.2 v1(62.13,16.76) ; 10.16,51.53 v2(10.16,52.07) ; v2(10.16,52.07) 9.62,52.07 ; v2(10.16,52.07) 10.16,52.61 ; v2(10.16,52.07) 10.7,52.07 ; v2(41.73,9.93) 41.73,10.47 ; v2(41.73,9.93) 41.73,9.4 ; v2(41.73,9.93) 41.2,9.93 ; v2(41.73,9.93) 42.27,9.93 ; 13.44,14.58 v2(13.44,15.11) ; v2(13.44,15.11) 12.9,15.11 ; v2(13.44,15.11) 13.44,15.65 ; v2(13.44,15.11) 13.97,15.11 ; 9.47,44.37 v1(9.47,44.75) ; v1(9.47,44.75) 9.09,44.75 ; v1(9.47,44.75) 9.47,45.14 ; v1(9.47,44.75) 9.86,44.75 ; 18.87,9.4 v2(18.87,9.93) ; v2(18.87,9.93) 18.87,10.47 ; v2(18.87,9.93) 18.34,9.93 ; v2(18.87,9.93) 19.41,9.93 ; 19.86,57.96 v2(19.86,58.5) ; v2(19.86,58.5) 19.86,59.03 ; v2(19.86,58.5) 19.33,58.5 ; v2(19.86,58.5) 20.4,58.5 ; 8.69,30.02 U1.34 6.83,30.02 ; v2(36.65,9.93) 37.19,9.93 ; v2(36.65,9.93) 36.12,9.93 ; v2(36.65,9.93) 36.65,10.47 ; v2(36.65,9.93) 36.65,9.4 ; v1(35.69,49.17) 36.07,49.17 ; v1(35.69,49.17) 35.69,49.56 ; v1(35.69,49.17) 35.3,49.17 ; v1(35.69,49.17) 35.69,48.79 ; 62.13,37.72 v1(62.13,38.1) ; v1(62.13,38.1) 62.13,38.48 ; v1(62.13,38.1) 62.51,38.1 ; 62.13,42.29 v1(62.13,42.67) ; v1(62.13,42.67) 62.51,42.67 ; v1(62.13,42.67) 62.13,43.06 ; v1(62.13,42.67) R24.2 ; 51.79,8.33 v1(52.17,8.33) ; v1(52.17,8.33) 52.56,8.33 ; v1(52.17,8.33) 52.17,7.95 ; v1(52.17,8.33) 52.17,8.71 ; 41.2,15.01 v2(41.73,15.01) ; v2(41.73,15.01) 41.73,15.55 ; v2(41.73,15.01) 41.73,14.48 ; v2(41.73,15.01) 42.27,15.01 ; v1(62.13,39.62) 62.13,40.01 ; v1(62.13,39.62) 62.51,39.62 ; v1(62.13,39.62) 62.13,39.24 ; R59.2 61.19,32.59 ; R59.2 60.63,32 ; R59.2 v1(62.13,32) ; R59.2 61.19,31.42 ; R36.2 61.19,47.83 ; R36.2 61.19,46.66 ; R36.2 60.63,47.24 ; R36.2 v1(62.13,47.24) ; 2.11,21.41 v1(2.11,21.79) ; v1(2.11,21.79) 2.49,21.79 ; v1(2.11,21.79) 2.11,22.18 ; v1(2.11,21.79) 1.72,21.79 ; v1(9.04,49.28) 9.04,49.66 ; v1(9.04,49.28) 9.43,49.28 ; v1(9.04,49.28) 8.66,49.28 ; 28.02,46.5 v1(28.02,46.89) ; v1(28.02,46.89) 28.4,46.89 ; v1(28.02,46.89) 27.63,46.89 ; v1(28.02,46.89) 28.02,47.27 ; 61.19,42.09 R24.2 ; R24.2 60.63,42.67 ; R24.2 61.19,43.26 ; 1.72,37.03 v1(2.11,37.03) ; v1(2.11,37.03) 2.11,36.65 ; v1(2.11,37.03) 2.11,37.42 ; v1(2.11,37.03) 2.49,37.03 ; 15.32,46.5 v1(15.32,46.89) ; v1(15.32,46.89) 15.32,47.27 ; v1(15.32,46.89) 15.7,46.89 ; v1(15.32,46.89) 14.93,46.89 ; 8,47.14 v1(8,47.52) ; v1(8,47.52) 8.38,47.52 ; v1(8,47.52) 8,47.91 ; v1(8,47.52) 7.62,47.52 ; R49.2 3.38,30.15 ; R49.2 2.82,29.57 ; R49.2 3.38,28.98 ; R49.2 3.94,29.57 ; 20.4,46.5 v1(20.4,46.89) ; v1(20.4,46.89) 20.78,46.89 ; v1(20.4,46.89) 20.4,47.27 ; v1(20.4,46.89) 20.01,46.89 ; v2(5.82,15.11) 5.82,15.65 ; v2(5.82,15.11) 5.28,15.11 ; v2(5.82,15.11) 5.82,14.58 ; v2(5.82,15.11) 6.35,15.11 ; 2.69,18.72 v2(2.69,19.25) ; v2(2.69,19.25) 2.69,19.79 ; v2(2.69,19.25) 2.16,19.25 ; v2(2.69,19.25) 3.23,19.25 ; 61.19,19.23 R27.2 ; R27.2 v1(62.13,19.81) ; R27.2 61.19,20.4 ; R27.2 60.63,19.81 ; v1(62.13,25.91) 62.13,26.29 ; v1(62.13,25.91) 62.13,25.52 ; v1(62.13,25.91) 62.51,25.91 ; 1.72,44.65 v1(2.11,44.65) ; v1(2.11,44.65) 2.49,44.65 ; v1(2.11,44.65) 2.11,45.04 ; v1(2.11,44.65) 2.11,44.27 ; v2(23.95,15.01) 23.95,15.55 ; v2(23.95,15.01) 23.42,15.01 ; v2(23.95,15.01) 24.49,15.01 ; v2(23.95,15.01) 23.95,14.48 ; R66.2 3.38,45.14 ; R66.2 3.94,44.55 ; R66.2 3.38,43.96 ; R66.2 2.82,44.55 ; 12.9,12.57 v2(13.44,12.57) ; v2(13.44,12.57) 13.44,12.04 ; v2(13.44,12.57) 13.97,12.57 ; v2(13.44,12.57) 13.44,13.11 ; 19.86,63.04 v2(19.86,63.58) ; v2(19.86,63.58) 19.33,63.58 ; v2(19.86,63.58) 20.4,63.58 ; v2(19.86,63.58) 19.86,64.11 ; v2(12.24,61.04) 12.24,61.57 ; v2(12.24,61.04) 11.71,61.04 ; v2(12.24,61.04) 12.78,61.04 ; v2(12.24,61.04) 12.24,60.5 ; v2(23.95,9.93) 23.95,10.47 ; v2(23.95,9.93) 24.49,9.93 ; v2(23.95,9.93) 23.42,9.93 ; v2(23.95,9.93) 23.95,9.4 ; v2(21.41,12.47) 21.95,12.47 ; v2(21.41,12.47) 21.41,11.94 ; v2(21.41,12.47) 21.41,13.01 ; v2(21.41,12.47) 20.88,12.47 ; v1(2.11,34.49) 2.49,34.49 ; v1(2.11,34.49) 1.72,34.49 ; v1(2.11,34.49) 2.11,34.11 ; v1(2.11,34.49) 2.11,34.88 ; 53.11,12.14 v1(53.11,12.52) ; v1(53.11,12.52) 53.49,12.52 ; v1(53.11,12.52) 53.11,12.91 ; v1(53.11,12.52) 52.73,12.52 ; R44.2 61.19,50.88 ; R44.2 61.19,49.71 ; R44.2 60.63,50.29 ; v1(2.11,33.22) 2.49,33.22 ; v1(2.11,33.22) 2.11,32.84 ; v1(2.11,33.22) 2.11,33.61 ; v1(2.11,33.22) 1.72,33.22 ; v1(29.54,52.7) 29.54,53.09 ; v1(29.54,52.7) 29.16,52.7 ; v1(29.54,52.7) 29.92,52.7 ; v1(29.54,52.7) 29.54,52.32 ; v2(18.87,15.01) 19.41,15.01 ; v2(18.87,15.01) 18.87,14.48 ; v2(18.87,15.01) 18.87,15.55 ; v2(18.87,15.01) 18.34,15.01 ; 8.69,42.02 U1.78 6.83,42.02 ; v2(21.41,15.01) 21.95,15.01 ; v2(21.41,15.01) 20.88,15.01 ; v2(21.41,15.01) 21.41,14.48 ; v2(21.41,15.01) 21.41,15.55 ; 3.28,9.5 v2(3.28,10.03) ; v2(3.28,10.03) 3.28,10.57 ; v2(3.28,10.03) 3.81,10.03 ; v2(3.28,10.03) 2.74,10.03 ; 12.03,43.77 U1.83 ; R48.2 61.19,51.23 ; R48.2 61.19,52.4 ; R48.2 60.63,51.82 ; 60.63,15.24 R15.2 ; R15.2 61.19,15.83 ; R15.2 61.19,14.65 ; R15.2 v1(62.13,15.24) ; 6.83,34.27 U1.50 8.29,34.27 ; v1(62.13,45.72) 62.13,46.1 ; v1(62.13,45.72) 62.13,45.34 ; v1(62.13,45.72) 62.51,45.72 ; v1(17.86,46.89) 18.24,46.89 ; v1(17.86,46.89) 17.86,46.5 ; v1(17.86,46.89) 17.86,47.27 ; v1(17.86,46.89) 17.47,46.89 ; v1(25.96,2.97) 25.96,3.36 ; v1(25.96,2.97) 25.96,2.59 ; v1(25.96,2.97) 26.34,2.97 ; v1(25.96,2.97) 25.58,2.97 ; 6.83,36.02 U1.56 8.69,36.02 ; 7.82,12.57 v2(8.36,12.57) ; v2(8.36,12.57) 8.89,12.57 ; v2(8.36,12.57) 8.36,13.11 ; v2(8.36,12.57) 8.36,12.04 ; v1(62.13,28.96) 62.51,28.96 ; v1(62.13,28.96) 62.13,29.34 ; v1(62.13,28.96) 62.13,28.57 ; v1(62.13,19.81) 62.51,19.81 ; v1(62.13,19.81) 62.13,19.43 ; v1(62.13,19.81) 62.13,20.2 ; 2.74,12.57 v2(3.28,12.57) ; v2(3.28,12.57) 3.28,13.11 ; v2(3.28,12.57) 3.28,12.04 ; v2(3.28,12.57) 3.81,12.57 ; v1(47.52,19.51) 47.52,19.89 ; v1(47.52,19.51) 47.52,19.12 ; v1(47.52,19.51) 47.14,19.51 ; v1(47.52,19.51) 47.91,19.51 ; 7.36,46.05 v1(7.75,46.05) ; v1(7.75,46.05) 7.75,46.43 ; v1(7.75,46.05) 8.13,46.05 ; v1(7.75,46.05) 7.75,45.67 ; v1(62.13,16.76) 62.13,17.15 ; v1(62.13,16.76) 62.51,16.76 ; v1(62.13,16.76) 62.13,16.38 ; U1.B1 11.89,18.07 ; U1.B1 10.16,19.05 ; U1.B1 10.16,17.09 ; U1.B1 8.43,18.07 ; 36.12,15.01 v2(36.65,15.01) ; v2(36.65,15.01) 37.19,15.01 ; v2(36.65,15.01) 36.65,15.55 ; v2(36.65,15.01) 36.65,14.48 ; 62.13,30.1 v1(62.13,30.48) ; v1(62.13,30.48) 62.13,30.86 ; v1(62.13,30.48) 62.51,30.48 ; 62.13,46.86 v1(62.13,47.24) ; v1(62.13,47.24) 62.13,47.63 ; v1(62.13,47.24) 62.51,47.24 ; R1.2 61.19,11.25 ; R1.2 61.19,10.08 ; R1.2 60.63,10.67 ; 6.83,31.77 U1.40 8.29,31.77 ; v1(62.13,15.24) 62.51,15.24 ; v1(62.13,15.24) 62.13,14.86 ; v1(62.13,15.24) 62.13,15.62 ; 44.22,17.68 v1(44.6,17.68) ; v1(44.6,17.68) 44.6,18.06 ; v1(44.6,17.68) 44.99,17.68 ; v1(44.6,17.68) 44.6,17.29 ; v2(29.03,12.47) 29.57,12.47 ; v2(29.03,12.47) 29.03,13.01 ; v2(29.03,12.47) 28.5,12.47 ; v2(29.03,12.47) 29.03,11.94 ; 26.87,52.07 v1(26.87,52.45) ; v1(26.87,52.45) 26.49,52.45 ; v1(26.87,52.45) 26.87,52.83 ; v1(26.87,52.45) 27.26,52.45 ; v2(10.13,20.12) 10.13,20.65 ; v2(10.13,20.12) 10.13,19.58 ; v2(10.13,20.12) 9.6,20.12 ; v2(10.13,20.12) 10.67,20.12 ; 12.03,28.27 U1.27 ; v1(62.13,53.34) 62.13,53.72 ; v1(62.13,53.34) 62.13,52.96 ; v1(62.13,53.34) 62.51,53.34 ; 1.72,25.6 v1(2.11,25.6) ; v1(2.11,25.6) 2.11,25.22 ; v1(2.11,25.6) 2.49,25.6 ; v1(2.11,25.6) 2.11,25.99 ; 23.19,5.61 v1(23.57,5.61) ; v1(23.57,5.61) 23.57,5.23 ; v1(23.57,5.61) 23.57,6 ; v1(23.57,5.61) 23.95,5.61 ; 62.13,31.62 v1(62.13,32) ; v1(62.13,32) 62.13,32.39 ; v1(62.13,32) 62.51,32 ; 27.68,49.17 v1(28.07,49.17) ; v1(28.07,49.17) 28.45,49.17 ; v1(28.07,49.17) 28.07,48.79 ; v1(28.07,49.17) 28.07,49.56 ; v1(62.13,33.53) 62.51,33.53 ; v1(62.13,33.53) 62.13,33.14 ; v1(62.13,33.53) 62.13,33.91 ; 11.63,24.02 U1.11 ; 12.03,25.77 U1.17 ; v1(37.57,17.65) 37.57,18.04 ; v1(37.57,17.65) 37.57,17.27 ; v1(37.57,17.65) 37.18,17.65 ; v1(37.57,17.65) 37.95,17.65 ; 21.89,19.68 v1(22.28,19.68) ; v1(22.28,19.68) 22.28,20.07 ; v1(22.28,19.68) 22.66,19.68 ; v1(22.28,19.68) 22.28,19.3 ; R31.2 61.19,21.92 ; R31.2 60.63,21.34 ; R31.2 61.19,20.75 ; v1(10.92,44.75) 11.31,44.75 ; v1(10.92,44.75) 10.92,45.14 ; v1(10.92,44.75) 10.92,44.37 ; v1(10.92,44.75) 10.54,44.75 ; v1(2.11,28.14) 2.49,28.14 ; v1(2.11,28.14) 2.11,27.76 ; v1(2.11,28.14) 1.72,28.14 ; v1(2.11,28.14) 2.11,28.53 ; v1(9.37,22.3) 9.76,22.3 ; v1(9.37,22.3) 8.99,22.3 ; v1(9.37,22.3) 9.37,21.92 ; v1(9.37,22.3) 9.37,22.68 ; 16.86,17.65 v1(17.25,17.65) ; v1(17.25,17.65) 17.25,18.04 ; v1(17.25,17.65) 17.63,17.65 ; v1(17.25,17.65) 17.25,17.27 ; v1(54.31,57.96) 54.31,58.35 ; v1(54.31,57.96) 53.92,57.96 ; v1(54.31,57.96) 54.31,57.58 ; v1(54.31,57.96) 54.69,57.96 ; v1(52.55,56.24) 52.94,56.24 ; v1(52.55,56.24) 52.55,55.85 ; v1(52.55,56.24) 52.55,56.62 ; v1(52.55,56.24) 52.17,56.24 ; v2(31.57,12.47) 32.11,12.47 ; v2(31.57,12.47) 31.57,13.01 ; v2(31.57,12.47) 31.57,11.94 ; v2(31.57,12.47) 31.04,12.47 ; v2(8.36,10.03) 8.89,10.03 ; v2(8.36,10.03) 8.36,9.5 ; v2(8.36,10.03) 8.36,10.57 ; v2(8.36,10.03) 7.82,10.03 ; 22.6,49.17 v1(22.99,49.17) ; v1(22.99,49.17) 23.37,49.17 ; v1(22.99,49.17) 22.99,49.56 ; v1(22.99,49.17) 22.99,48.79 ; 19.86,60.5 v2(19.86,61.04) ; v2(19.86,61.04) 19.33,61.04 ; v2(19.86,61.04) 19.86,61.57 ; v2(19.86,61.04) 20.4,61.04 ; 3.38,22.83 R17.2 ; R17.2 3.94,23.42 ; R17.2 2.82,23.42 ; R17.2 3.38,24.01 ; v2(10.9,12.57) 10.9,13.11 ; v2(10.9,12.57) 10.36,12.57 ; v2(10.9,12.57) 10.9,12.04 ; v2(10.9,12.57) 11.43,12.57 ; 2.74,15.11 v2(3.28,15.11) ; v2(3.28,15.11) 3.28,14.58 ; v2(3.28,15.11) 3.81,15.11 ; v2(3.28,15.11) 3.28,15.65 ; v2(16.28,15.14) 16.82,15.14 ; v2(16.28,15.14) 16.28,15.67 ; v2(16.28,15.14) 16.28,14.6 ; v2(16.28,15.14) 15.75,15.14 ; v2(31.57,15.01) 32.11,15.01 ; v2(31.57,15.01) 31.57,15.55 ; v2(31.57,15.01) 31.57,14.48 ; v2(31.57,15.01) 31.04,15.01 ; v1(12.22,48.51) 12.22,48.9 ; v1(12.22,48.51) 12.22,48.13 ; v1(12.22,48.51) 12.6,48.51 ; 24.94,60.5 v2(24.94,61.04) ; v2(24.94,61.04) 24.94,61.57 ; v2(24.94,61.04) 24.41,61.04 ; v2(24.94,61.04) 25.48,61.04 ; 12.17,47.09 v1(12.17,47.47) ; v1(12.17,47.47) 12.55,47.47 ; v1(12.17,47.47) 12.17,47.86 ; 12.03,31.77 U1.39 ; 6.83,24.02 U1.12 8.69,24.02 ; 12.03,22.27 U1.5 ; 11.63,42.02 U1.77 ; v1(50.01,53.75) 50.01,54.13 ; v1(50.01,53.75) 50.4,53.75 ; v1(50.01,53.75) 50.01,53.36 ; v1(50.01,53.75) 49.63,53.75 ; v2(5.82,12.57) 6.35,12.57 ; v2(5.82,12.57) 5.82,13.11 ; v2(5.82,12.57) 5.82,12.04 ; v2(5.82,12.57) 5.28,12.57 ; 14.78,60.5 v2(14.78,61.04) ; v2(14.78,61.04) 15.32,61.04 ; v2(14.78,61.04) 14.78,61.57 ; v2(14.78,61.04) 14.25,61.04 ; 6.83,22.27 U1.6 8.29,22.27 ; 12.03,34.27 U1.49 ; 11.63,30.02 U1.33 ; 6.83,28.27 U1.28 8.29,28.27 ; 9.7,60.5 v2(9.7,61.04) ; v2(9.7,61.04) 9.7,61.57 ; v2(9.7,61.04) 10.24,61.04 ; v2(9.7,61.04) 9.17,61.04 ; 12.03,40.27 U1.71 ; 11.63,36.02 U1.55
  vias: v1(51.56,23.44) v1(52.81,22.25) v1(54.2,20.73) v1(55.33,19.49) v1(55.5,26.92)
